# EAGLE board proto (EAGLE 9.3.2)
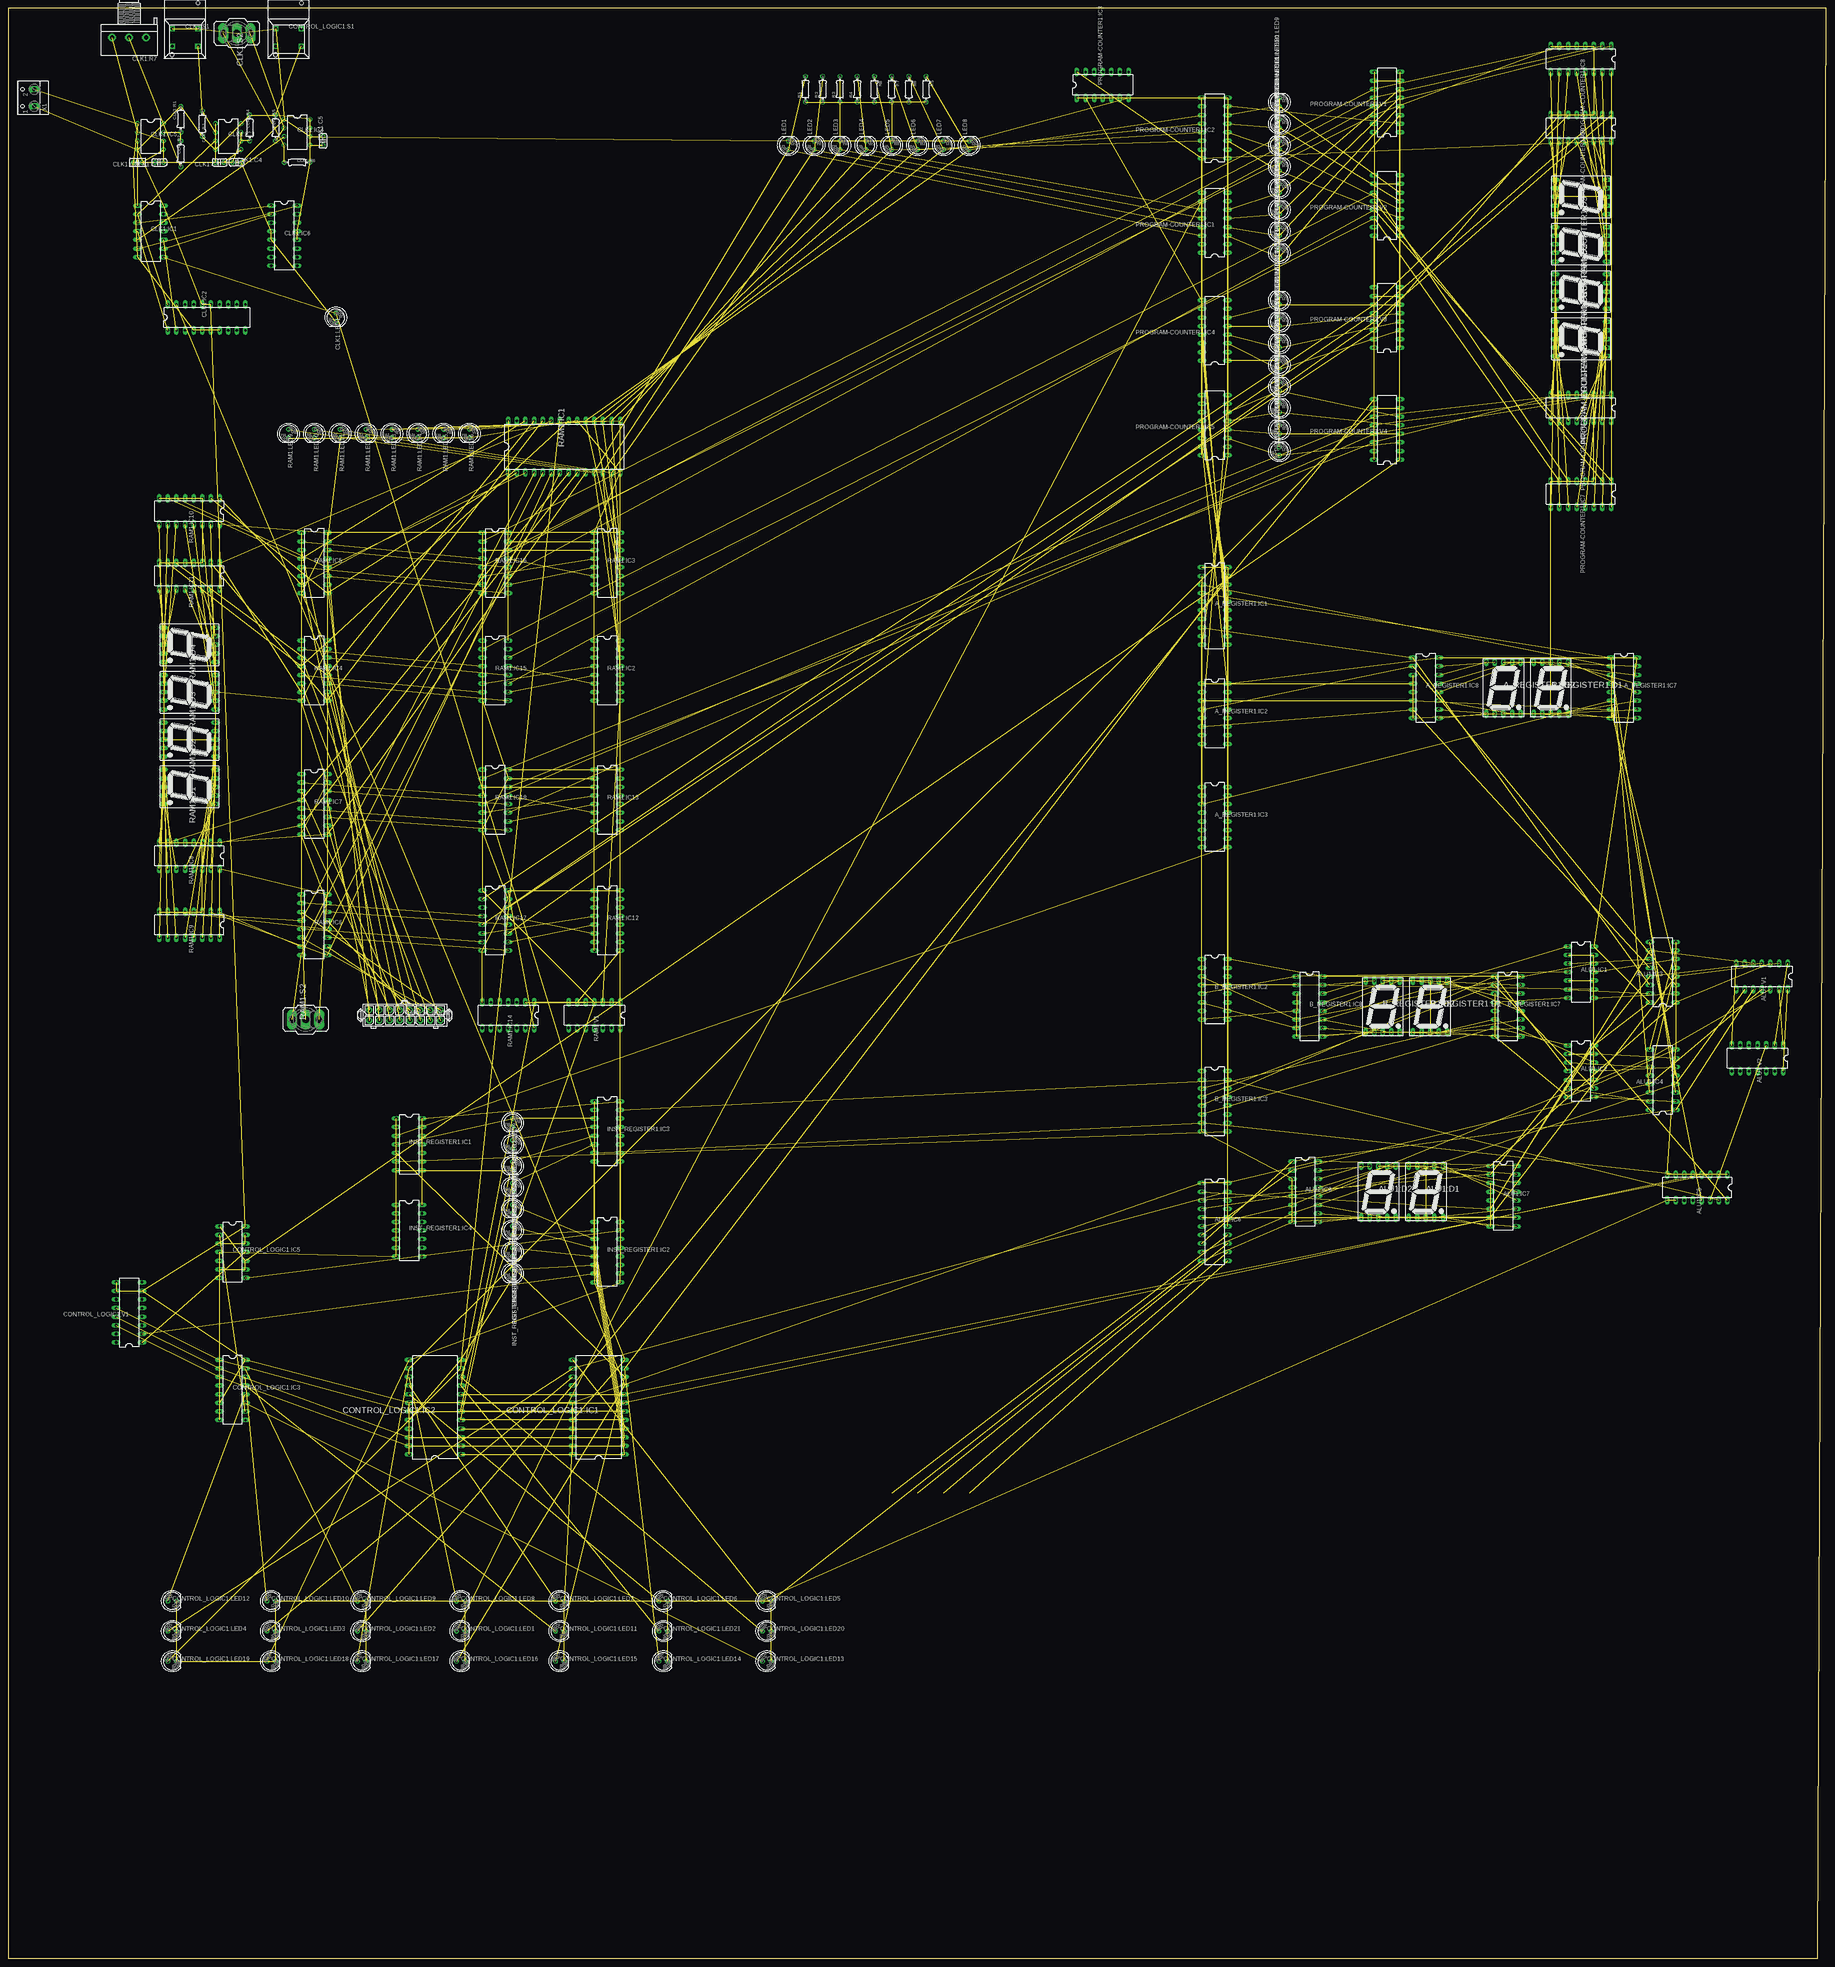
[diagram p0: board, top side]
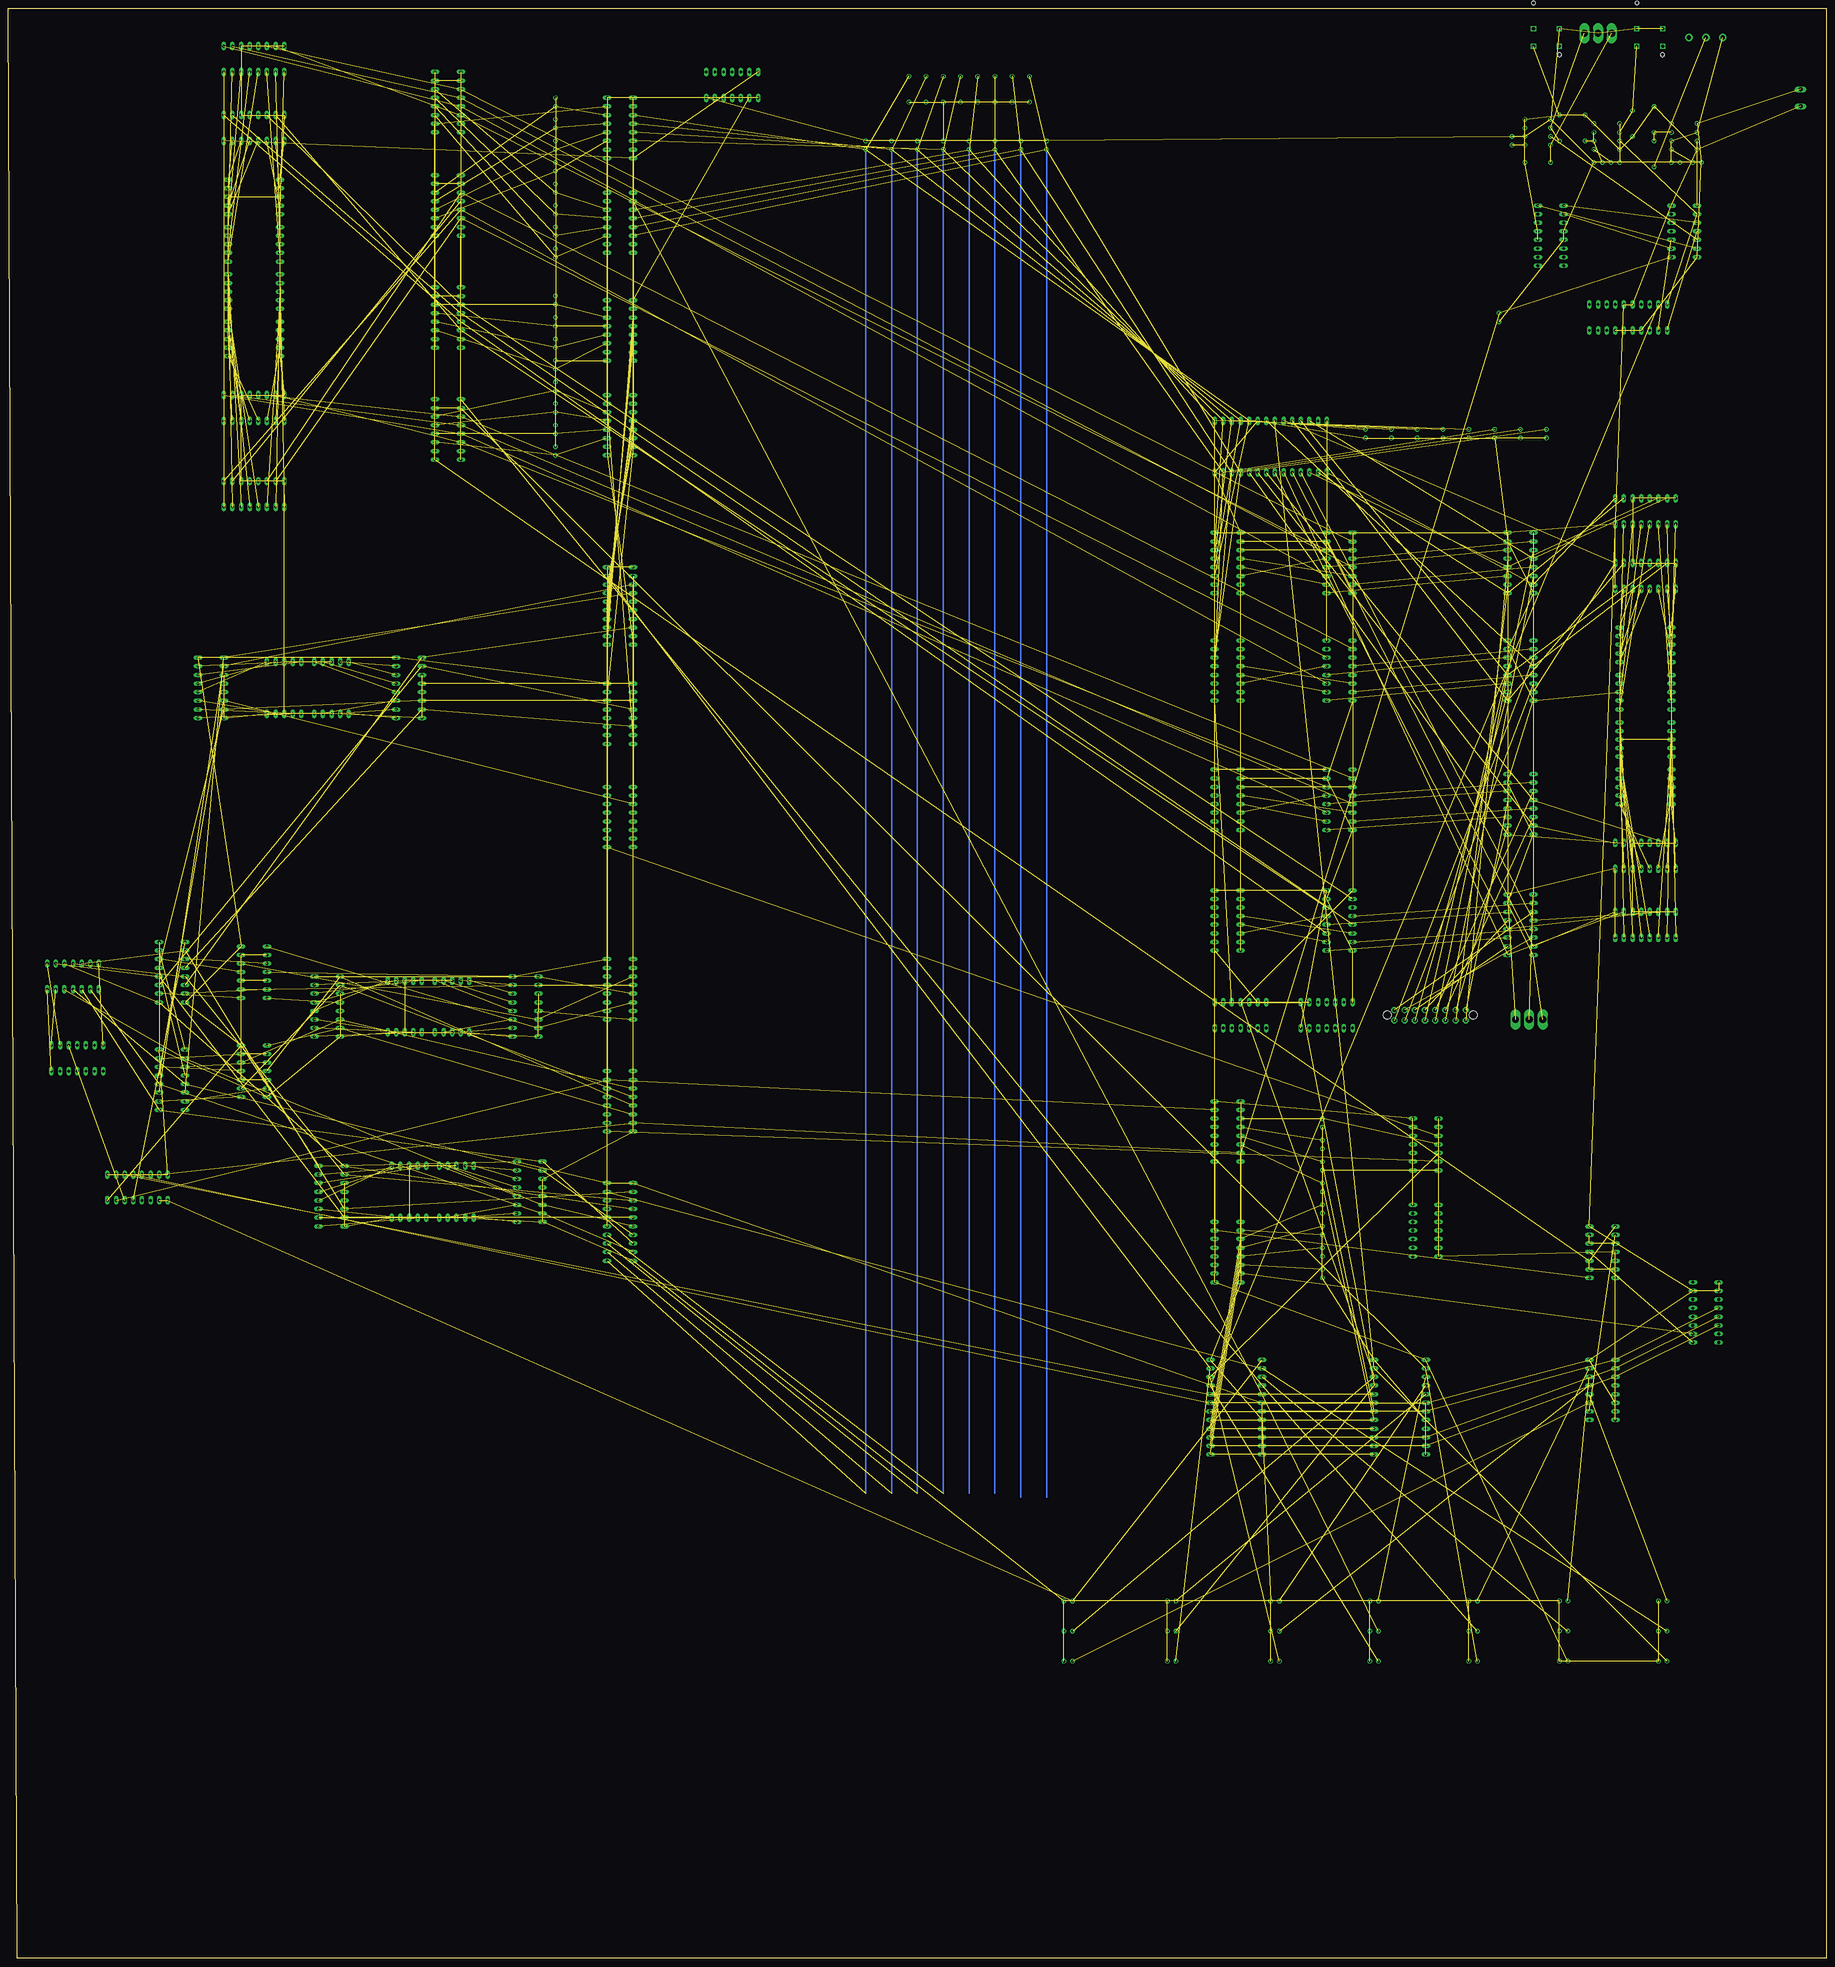
[diagram p1: board, bottom side, seen from below]

Size 535.92 x 574.98 mm. Coordinates in mm from the lower left corner, seen from the top.
Outline: 0,0 533.38,0 535.92,574.98 0,574.98 0,0
Copper layers (1*16): Top 0.035mm / dielectric 1.5mm / Bottom 0.035mm
Design rules "default": minimum track width 6mil, minimum drill 0.35mm, track to track 6mil, track to pad 6mil, pad to pad 6mil, via to via 6mil, smd to smd 6mil, copper to edge 40mil, drill to drill 6mil, minimum pad ring 10mil, minimum via ring 8mil, stop-mask expansion 4mil, vias tented up to drill 0mil, thermal gap 10mil

## Footprints (pad centres in the part's own frame; a part is rotated, then mirrored left to right if it is on the bottom)
7SEG-13 = drill 0.813 long: 1 -5.08,-7.62; 2 -2.54,-7.62; 3 0,-7.62; 4 2.54,-7.62; 5 5.08,-7.62; 6 5.08,7.62; 7 2.54,7.62; 8 0,7.62; 9 -2.54,7.62; 10 -5.08,7.62
DIL20 = drill 0.813 long: 1 -11.43,-3.81; 2 -8.89,-3.81; 3 -6.35,-3.81; 4 -3.81,-3.81; 5 -1.27,-3.81; 6 1.27,-3.81; 7 3.81,-3.81; 8 6.35,-3.81; 9 8.89,-3.81; 10 11.43,-3.81; 11 11.43,3.81; 12 8.89,3.81; 13 6.35,3.81; 14 3.81,3.81; 15 1.27,3.81; 16 -1.27,3.81; 17 -3.81,3.81; 18 -6.35,3.81; 19 -8.89,3.81; 20 -11.43,3.81
DIL16 = drill 0.813 long: 1 -8.89,-3.81; 2 -6.35,-3.81; 3 -3.81,-3.81; 4 -1.27,-3.81; 5 1.27,-3.81; 6 3.81,-3.81; 7 6.35,-3.81; 8 8.89,-3.81; 9 8.89,3.81; 10 6.35,3.81; 11 3.81,3.81; 12 1.27,3.81; 13 -1.27,3.81; 14 -3.81,3.81; 15 -6.35,3.81; 16 -8.89,3.81
DIL14 = drill 0.813 long: 1 -7.62,-3.81; 2 -5.08,-3.81; 3 -2.54,-3.81; 4 0,-3.81; 5 2.54,-3.81; 6 5.08,-3.81; 7 7.62,-3.81; 8 7.62,3.81; 9 5.08,3.81; 10 2.54,3.81; 11 0,3.81; 12 -2.54,3.81; 13 -5.08,3.81; 14 -7.62,3.81
C025-024X044 = drill 0.813 octagon: 1 -1.27,0; 2 1.27,0
C025-025X050 = drill 0.813 octagon: 1 -1.27,0; 2 1.27,0
DIL08 = drill 0.813 pad 1.27: 1 -3.81,-3.81; 2 -1.27,-3.81; 3 1.27,-3.81; 4 3.81,-3.81; 5 3.81,3.81; 6 1.27,3.81; 7 -1.27,3.81; 8 -3.81,3.81
LED5MM = drill 0.813 octagon: A -1.27,0; K 1.27,0
0204/7 = drill 0.813 octagon: 1 -3.81,0; 2 3.81,0
3RP/1610N = drill 1.2 pad 2.184: 1 -5,0; 2 0,0; 3 5,0
5501 = drill 0.9 pad 1.5 square: 1A 0,3.81; 1B 0,-3.81; NC 5.08,-3.81; NO 5.08,3.81 | hole 1.1: -7.62,3.81; 7.62,-3.81
320-916 = drill 2.007 long: 1 0,4.013; 2 0,0; 3 0,-4.013
DIL24 = drill 0.813 long: 1 -13.97,-7.62; 2 -11.43,-7.62; 3 -8.89,-7.62; 4 -6.35,-7.62; 5 -3.81,-7.62; 6 -1.27,-7.62; 7 1.27,-7.62; 8 3.81,-7.62; 9 6.35,-7.62; 10 8.89,-7.62; 11 11.43,-7.62; 12 13.97,-7.62; 13 13.97,7.62; 14 11.43,7.62; 15 8.89,7.62; 16 6.35,7.62; 17 3.81,7.62; 18 1.27,7.62; 19 -1.27,7.62; 20 -3.81,7.62; 21 -6.35,7.62; 22 -8.89,7.62; 23 -11.43,7.62; 24 -13.97,7.62
DIL28-6 = drill 0.813 long: 1 -16.51,-7.62; 2 -13.97,-7.62; 3 -11.43,-7.62; 4 -8.89,-7.62; 5 -6.35,-7.62; 6 -3.81,-7.62; 7 -1.27,-7.62; 8 1.27,-7.62; 9 3.81,-7.62; 10 6.35,-7.62; 11 8.89,-7.62; 12 11.43,-7.62; 13 13.97,-7.62; 14 16.51,-7.62; 15 16.51,7.62; 16 13.97,7.62; 17 11.43,7.62; 18 8.89,7.62; 19 6.35,7.62; 20 3.81,7.62; 21 1.27,7.62; 22 -1.27,7.62; 23 -3.81,7.62; 24 -6.35,7.62; 25 -8.89,7.62; 26 -11.43,7.62; 27 -13.97,7.62; 28 -16.51,7.62
1-794681-6 = drill 1 pad 1.778: 1 10.5,-1.5; 2 10.5,1.5; 3 7.5,-1.5; 4 7.5,1.5; 5 4.5,-1.5; 6 4.5,1.5; 7 1.5,-1.5; 8 1.5,1.5; 9 -1.5,-1.5; 10 -1.5,1.5; 11 -4.5,-1.5; 12 -4.5,1.5; 13 -7.5,-1.5; 14 -7.5,1.5; 15 -10.5,-1.5; 16 -10.5,1.5 | hole 2.4: 12.63,0; -12.67,0
W237-102 = drill 1.194 long: 1 -2.5,-1.27; 2 2.5,-1.27

## Placement (x,y rotation side)
A_REGISTER1:D1  [7SEG-13]  454.66,374.65 0 top
A_REGISTER1:D2  [7SEG-13]  440.69,374.65 0 top
A_REGISTER1:IC1  74ACT245N  [DIL20]  355.6,398.78 270 top
A_REGISTER1:IC2  74HC173N  [DIL16]  355.6,367.03 270 top
A_REGISTER1:IC3  74HC173N  [DIL16]  355.6,336.55 270 top
A_REGISTER1:IC7  74LS47N  [DIL16]  476.25,374.65 270 top
A_REGISTER1:IC8  74LS47N  [DIL16]  417.83,374.65 270 top
ALU1:D1  [7SEG-13]  417.83,226.06 0 top
ALU1:D2  [7SEG-13]  403.86,226.06 0 top
ALU1:IC1  74LS86N  [DIL14]  463.55,290.83 270 top
ALU1:IC2  74LS86N  [DIL14]  463.55,261.62 270 top
ALU1:IC3  74AC283N  [DIL16]  487.68,290.83 90 top
ALU1:IC4  74AC283N  [DIL16]  487.68,259.08 90 top
ALU1:IC5  74HC173N  [DIL16]  497.84,227.33 180 top
ALU1:IC6  74ACT245N  [DIL20]  355.6,217.17 270 top
ALU1:IC7  74LS47N  [DIL16]  440.69,224.79 270 top
ALU1:IC8  74LS47N  [DIL16]  382.27,226.06 270 top
ALU1:V1  744002N  [DIL14]  516.89,289.56 180 top
ALU1:V2  7409N  [DIL14]  515.62,265.43 180 top
B_REGISTER1:D1  [7SEG-13]  419.1,280.67 0 top
B_REGISTER1:D2  [7SEG-13]  405.13,280.67 0 top
B_REGISTER1:IC2  74HC173N  [DIL16]  355.6,285.75 270 top
B_REGISTER1:IC3  74HC173N  [DIL16]  355.6,252.73 270 top
B_REGISTER1:IC7  74LS47N  [DIL16]  441.96,280.67 270 top
B_REGISTER1:IC8  74LS47N  [DIL16]  383.54,280.67 270 top
CLK1:C1  1uf  [C025-024X044]  44.45,529.59 180 top
CLK1:C2  0.01uF  [C025-025X050]  38.1,529.59 180 top
CLK1:C3  0.01uF  [C025-024X044]  62.23,529.59 180 top
CLK1:C4  0.1uf  [C025-024X044]  67.31,529.59 0 top
CLK1:C5  0.01uF  [C025-024X044]  92.71,535.94 90 top
CLK1:IC1  74ALS09N  [DIL14]  41.91,509.27 270 top
CLK1:IC2  74AC11004  [DIL20]  58.42,483.87 0 top
CLK1:IC3  LM555N  [DIL08]  64.77,537.21 270 top
CLK1:IC4  LM555N  [DIL08]  85.09,538.48 270 top
CLK1:IC5  LM555N  [DIL08]  41.91,537.21 270 top
CLK1:IC6  74AC11032  [DIL16]  81.28,508 270 top
CLK1:LED1  [LED5MM]  96.52,483.87 270 top
CLK1:R1  1k  [0204/7]  50.8,542.29 90 top
CLK1:R2  1k  [0204/7]  50.8,532.13 90 top
CLK1:R3  1k  [0204/7]  57.15,541.02 270 top
CLK1:R4  1k  [0204/7]  71.12,539.75 90 top
CLK1:R5  1k  [0204/7]  78.74,539.75 90 top
CLK1:R6  1k  [0204/7]  85.09,529.59 0 top
CLK1:R7  [3RP/1610N]  35.56,566.42 180 top
CLK1:S1  5501  [5501]  52.07,568.96 270 top
CLK1:S2  [320-916]  67.31,567.69 270 top
CONTROL_LOGIC1:IC1  [DIL24]  173.99,162.56 90 top
CONTROL_LOGIC1:IC2  [DIL24]  125.73,162.56 90 top
CONTROL_LOGIC1:IC3  74AC138N  [DIL16]  66.04,167.64 270 top
CONTROL_LOGIC1:IC5  74AC00N  [DIL14]  66.04,208.28 270 top
CONTROL_LOGIC1:LED1  [LED5MM]  133.35,96.52 0 top
CONTROL_LOGIC1:LED2  [LED5MM]  104.14,96.52 0 top
CONTROL_LOGIC1:LED3  [LED5MM]  77.47,96.52 0 top
CONTROL_LOGIC1:LED4  [LED5MM]  48.26,96.52 0 top
CONTROL_LOGIC1:LED5  [LED5MM]  223.52,105.41 0 top
CONTROL_LOGIC1:LED6  [LED5MM]  193.04,105.41 0 top
CONTROL_LOGIC1:LED7  [LED5MM]  162.56,105.41 0 top
CONTROL_LOGIC1:LED8  [LED5MM]  133.35,105.41 0 top
CONTROL_LOGIC1:LED9  [LED5MM]  104.14,105.41 0 top
CONTROL_LOGIC1:LED10  [LED5MM]  77.47,105.41 0 top
CONTROL_LOGIC1:LED11  [LED5MM]  162.56,96.52 0 top
CONTROL_LOGIC1:LED12  [LED5MM]  48.26,105.41 0 top
CONTROL_LOGIC1:LED13  [LED5MM]  223.52,87.63 0 top
CONTROL_LOGIC1:LED14  [LED5MM]  193.04,87.63 0 top
CONTROL_LOGIC1:LED15  [LED5MM]  162.56,87.63 0 top
CONTROL_LOGIC1:LED16  [LED5MM]  133.35,87.63 0 top
CONTROL_LOGIC1:LED17  [LED5MM]  104.14,87.63 0 top
CONTROL_LOGIC1:LED18  [LED5MM]  77.47,87.63 0 top
CONTROL_LOGIC1:LED19  [LED5MM]  48.26,87.63 0 top
CONTROL_LOGIC1:LED20  [LED5MM]  223.52,96.52 0 top
CONTROL_LOGIC1:LED21  [LED5MM]  193.04,96.52 0 top
CONTROL_LOGIC1:S1  5501  [5501]  82.55,568.96 270 top
CONTROL_LOGIC1:V1  74161N  [DIL16]  35.56,190.5 90 top
INST_REGISTER1:IC1  74ALS09N  [DIL14]  118.11,240.03 270 top
INST_REGISTER1:IC2  74HC173N  [DIL16]  176.53,208.28 270 top
INST_REGISTER1:IC3  74HC173N  [DIL16]  176.53,243.84 270 top
INST_REGISTER1:IC4  74AC04N  [DIL14]  118.11,214.63 270 top
INST_REGISTER1:LED9  [LED5MM]  148.59,246.38 270 top
INST_REGISTER1:LED10  [LED5MM]  148.59,240.03 270 top
INST_REGISTER1:LED11  [LED5MM]  148.59,233.68 270 top
INST_REGISTER1:LED12  [LED5MM]  148.59,227.33 270 top
INST_REGISTER1:LED13  [LED5MM]  148.59,220.98 270 top
INST_REGISTER1:LED14  [LED5MM]  148.59,214.63 270 top
INST_REGISTER1:LED15  [LED5MM]  148.59,208.28 270 top
INST_REGISTER1:LED16  [LED5MM]  148.59,201.93 270 top
LED1  [LED5MM]  229.87,534.67 90 top
LED2  [LED5MM]  237.49,534.67 90 top
LED3  [LED5MM]  245.11,534.67 90 top
LED4  [LED5MM]  252.73,534.67 90 top
LED5  [LED5MM]  260.35,534.67 90 top
LED6  [LED5MM]  267.97,534.67 90 top
LED7  [LED5MM]  275.59,534.67 90 top
LED8  [LED5MM]  283.21,534.67 90 top
PROGRAM-COUNTER1:D1  [7SEG-13]  463.55,491.49 270 top
PROGRAM-COUNTER1:D2  [7SEG-13]  463.55,505.46 270 top
PROGRAM-COUNTER1:D3  [7SEG-13]  463.55,519.43 270 top
PROGRAM-COUNTER1:D4  [7SEG-13]  463.55,477.52 270 top
PROGRAM-COUNTER1:IC1  74HC173N  [DIL16]  355.6,511.81 90 top
PROGRAM-COUNTER1:IC2  74HC173N  [DIL16]  355.6,539.75 90 top
PROGRAM-COUNTER1:IC3  74AC04N  [DIL14]  322.58,552.45 0 top
PROGRAM-COUNTER1:IC4  74HC173N  [DIL16]  355.6,480.06 90 top
PROGRAM-COUNTER1:IC5  74HC173N  [DIL16]  355.6,452.12 90 top
PROGRAM-COUNTER1:IC7  74LS47N  [DIL16]  463.55,431.8 180 top
PROGRAM-COUNTER1:IC8  74LS47N  [DIL16]  463.55,560.07 180 top
PROGRAM-COUNTER1:IC9  74LS47N  [DIL16]  463.55,539.75 180 top
PROGRAM-COUNTER1:IC10  74LS47N  [DIL16]  463.55,457.2 180 top
PROGRAM-COUNTER1:LED1  [LED5MM]  374.65,488.95 90 top
PROGRAM-COUNTER1:LED2  [LED5MM]  374.65,482.6 90 top
PROGRAM-COUNTER1:LED3  [LED5MM]  374.65,476.25 90 top
PROGRAM-COUNTER1:LED4  [LED5MM]  374.65,469.9 90 top
PROGRAM-COUNTER1:LED5  [LED5MM]  374.65,463.55 90 top
PROGRAM-COUNTER1:LED6  [LED5MM]  374.65,457.2 90 top
PROGRAM-COUNTER1:LED7  [LED5MM]  374.65,450.85 90 top
PROGRAM-COUNTER1:LED8  [LED5MM]  374.65,444.5 90 top
PROGRAM-COUNTER1:LED9  [LED5MM]  374.65,547.37 90 top
PROGRAM-COUNTER1:LED10  [LED5MM]  374.65,541.02 90 top
PROGRAM-COUNTER1:LED11  [LED5MM]  374.65,534.67 90 top
PROGRAM-COUNTER1:LED12  [LED5MM]  374.65,528.32 90 top
PROGRAM-COUNTER1:LED13  [LED5MM]  374.65,521.97 90 top
PROGRAM-COUNTER1:LED14  [LED5MM]  374.65,515.62 90 top
PROGRAM-COUNTER1:LED15  [LED5MM]  374.65,509.27 90 top
PROGRAM-COUNTER1:LED16  [LED5MM]  374.65,502.92 90 top
PROGRAM-COUNTER1:V1  74161N  [DIL16]  406.4,547.37 90 top
PROGRAM-COUNTER1:V2  74161N  [DIL16]  406.4,516.89 90 top
PROGRAM-COUNTER1:V3  74161N  [DIL16]  406.4,483.87 90 top
PROGRAM-COUNTER1:V4  74161N  [DIL16]  406.4,450.85 90 top
R1  10k  [0204/7]  234.95,551.18 90 top
R2  10k  [0204/7]  240.03,551.18 90 top
R3  10k  [0204/7]  245.11,551.18 90 top
R4  10k  [0204/7]  250.19,551.18 90 top
R5  10k  [0204/7]  270.51,551.18 270 top
R6  10k  [0204/7]  265.43,551.18 270 top
R7  10k  [0204/7]  260.35,551.18 270 top
R8  10k  [0204/7]  255.27,551.18 270 top
RAM1:D1  [7SEG-13]  53.34,345.44 270 top
RAM1:D2  [7SEG-13]  53.34,359.41 270 top
RAM1:D3  [7SEG-13]  53.34,373.38 270 top
RAM1:D4  [7SEG-13]  53.34,387.35 270 top
RAM1:IC1  CY62256LL-PC  [DIL28-6]  163.83,445.77 0 top
RAM1:IC2  74HC173N  [DIL16]  176.53,379.73 270 top
RAM1:IC3  74HC173N  [DIL16]  176.53,411.48 270 top
RAM1:IC4  74AC157N  [DIL16]  90.17,379.73 270 top
RAM1:IC5  74AC157N  [DIL16]  90.17,411.48 270 top
RAM1:IC6  74AC157N  [DIL16]  90.17,304.8 270 top
RAM1:IC7  74AC157N  [DIL16]  90.17,340.36 270 top
RAM1:IC8  74LS47N  [DIL16]  53.34,325.12 180 top
RAM1:IC9  74LS47N  [DIL16]  53.34,304.8 180 top
RAM1:IC10  74LS47N  [DIL16]  53.34,426.72 180 top
RAM1:IC11  74LS47N  [DIL16]  53.34,407.67 180 top
RAM1:IC12  74HC173N  [DIL16]  176.53,306.07 270 top
RAM1:IC13  74HC173N  [DIL16]  176.53,341.63 270 top
RAM1:IC14  74AC04N  [DIL14]  147.32,278.13 180 top
RAM1:IC15  74AC157N  [DIL16]  143.51,379.73 270 top
RAM1:IC16  74AC157N  [DIL16]  143.51,411.48 270 top
RAM1:IC17  74AC157N  [DIL16]  143.51,306.07 270 top
RAM1:IC18  74AC157N  [DIL16]  143.51,341.63 270 top
RAM1:LED9  [LED5MM]  82.55,449.58 270 top
RAM1:LED10  [LED5MM]  90.17,449.58 270 top
RAM1:LED11  [LED5MM]  97.79,449.58 270 top
RAM1:LED12  [LED5MM]  105.41,449.58 270 top
RAM1:LED13  [LED5MM]  113.03,449.58 270 top
RAM1:LED14  [LED5MM]  120.65,449.58 270 top
RAM1:LED15  [LED5MM]  128.27,449.58 270 top
RAM1:LED16  [LED5MM]  135.89,449.58 270 top
RAM1:M_ADDR  1-794681-6  [1-794681-6]  116.84,278.13 0 top
RAM1:S2  [320-916]  87.63,276.86 90 top
RAM1:V1  7409N  [DIL14]  172.72,278.13 180 top
X1  [W237-102]  6.35,548.64 90 top

## Library data of the parts
A_REGISTER1:D1 A_REGISTER1:D2 ALU1:D1 ALU1:D2 B_REGISTER1:D1 B_REGISTER1:D2 PROGRAM-COUNTER1:D1-PROGRAM-COUNTER1:D4 RAM1:D1-RAM1:D4 = special
A_REGISTER1:IC1-A_REGISTER1:IC3 A_REGISTER1:IC7 A_REGISTER1:IC8 ALU1:IC3-ALU1:IC8 B_REGISTER1:IC2 B_REGISTER1:IC3 B_REGISTER1:IC7 B_REGISTER1:IC8 CLK1:IC1 CONTROL_LOGIC1:IC3 CONTROL_LOGIC1:IC5 INST_REGISTER1:IC1-INST_REGISTER1:IC4 PROGRAM-COUNTER1:IC1-PROGRAM-COUNTER1:IC5 PROGRAM-COUNTER1:IC7-PROGRAM-COUNTER1:IC10 RAM1:IC2-RAM1:IC18 = 74xx-eu
ALU1:IC1 ALU1:IC2 = 74xx-us
ALU1:V1 ALU1:V2 CONTROL_LOGIC1:V1 PROGRAM-COUNTER1:V1-PROGRAM-COUNTER1:V4 RAM1:V1 = 74ttl-din
CLK1:C1-CLK1:C5 = rcl
CLK1:IC2 CLK1:IC6 = 74ac-logic
CLK1:IC3-CLK1:IC5 = linear
CLK1:LED1 CONTROL_LOGIC1:LED1-CONTROL_LOGIC1:LED21 INST_REGISTER1:LED9-INST_REGISTER1:LED16 LED1-LED8 PROGRAM-COUNTER1:LED1-PROGRAM-COUNTER1:LED16 RAM1:LED9-RAM1:LED16 = led
CLK1:R1-CLK1:R6 R1-R8 = rcl; SPICEPREFIX: R
CLK1:R7 = pot
CLK1:S1 CLK1:S2 CONTROL_LOGIC1:S1 RAM1:S2 = switch
CONTROL_LOGIC1:IC1 CONTROL_LOGIC1:IC2 = memory
RAM1:IC1 = memory-sram
RAM1:M_ADDR = con-amp
X1 = con-wago-500; MPN: 237-102; OC_FARNELL: unknown; OC_NEWARK: 70K9898

## Nets
8B_1: A_REGISTER1:IC1.18 A_REGISTER1:IC3.14 ALU1:IC6.18 B_REGISTER1:IC3.14 INST_REGISTER1:IC3.14 LED1.A PROGRAM-COUNTER1:IC1.14 PROGRAM-COUNTER1:IC5.14 R1.2 RAM1:IC1.11 RAM1:IC2.14 RAM1:IC12.14 RAM1:LED9.A
8B_2: A_REGISTER1:IC1.17 A_REGISTER1:IC3.13 ALU1:IC6.17 B_REGISTER1:IC3.13 INST_REGISTER1:IC3.13 LED2.A PROGRAM-COUNTER1:IC1.13 PROGRAM-COUNTER1:IC5.13 R2.2 RAM1:IC1.12 RAM1:IC2.13 RAM1:IC12.13 RAM1:LED10.A
8B_3: A_REGISTER1:IC1.16 A_REGISTER1:IC3.12 ALU1:IC6.16 B_REGISTER1:IC3.12 INST_REGISTER1:IC3.12 LED3.A PROGRAM-COUNTER1:IC1.12 PROGRAM-COUNTER1:IC5.12 R3.2 RAM1:IC1.13 RAM1:IC2.12 RAM1:IC12.12 RAM1:LED11.A
8B_4: A_REGISTER1:IC1.15 A_REGISTER1:IC3.11 ALU1:IC6.15 B_REGISTER1:IC3.11 INST_REGISTER1:IC3.11 LED4.A PROGRAM-COUNTER1:IC1.11 PROGRAM-COUNTER1:IC5.11 R4.2 RAM1:IC1.15 RAM1:IC2.11 RAM1:IC12.11 RAM1:LED12.A
8B_5: A_REGISTER1:IC1.14 A_REGISTER1:IC2.14 ALU1:IC6.14 LED5.A PROGRAM-COUNTER1:IC2.14 PROGRAM-COUNTER1:IC4.14 R8.1 RAM1:IC1.16 RAM1:IC3.14 RAM1:IC13.14 RAM1:LED13.A
8B_6: A_REGISTER1:IC1.13 A_REGISTER1:IC2.13 ALU1:IC6.13 LED6.A PROGRAM-COUNTER1:IC2.13 PROGRAM-COUNTER1:IC4.13 R7.1 RAM1:IC1.17 RAM1:IC3.13 RAM1:IC13.13 RAM1:LED14.A
8B_7: A_REGISTER1:IC1.12 A_REGISTER1:IC2.12 ALU1:IC6.12 LED7.A PROGRAM-COUNTER1:IC2.12 PROGRAM-COUNTER1:IC4.12 R6.1 RAM1:IC1.18 RAM1:IC3.12 RAM1:IC13.12 RAM1:LED15.A
8B_8: A_REGISTER1:IC1.11 A_REGISTER1:IC2.11 ALU1:IC6.11 LED8.A PROGRAM-COUNTER1:IC2.11 PROGRAM-COUNTER1:IC4.11 R5.1 RAM1:IC1.19 RAM1:IC3.11 RAM1:IC13.11 RAM1:LED16.A
A_REGISTER1:N$9: A_REGISTER1:D1.7 A_REGISTER1:IC7.13
A_REGISTER1:N$10: A_REGISTER1:D1.6 A_REGISTER1:IC7.12
A_REGISTER1:N$11: A_REGISTER1:D1.4 A_REGISTER1:IC7.11
A_REGISTER1:N$12: A_REGISTER1:D1.2 A_REGISTER1:IC7.10
A_REGISTER1:N$13: A_REGISTER1:D1.1 A_REGISTER1:IC7.9
A_REGISTER1:N$14: A_REGISTER1:D1.9 A_REGISTER1:IC7.15
A_REGISTER1:N$15: A_REGISTER1:D1.10 A_REGISTER1:IC7.14
A_REGISTER1:N$16: A_REGISTER1:D2.7 A_REGISTER1:IC8.13
A_REGISTER1:N$21: A_REGISTER1:D2.6 A_REGISTER1:IC8.12
A_REGISTER1:N$22: A_REGISTER1:D2.4 A_REGISTER1:IC8.11
A_REGISTER1:N$23: A_REGISTER1:D2.2 A_REGISTER1:IC8.10
A_REGISTER1:N$24: A_REGISTER1:D2.1 A_REGISTER1:IC8.9
A_REGISTER1:N$29: A_REGISTER1:D2.9 A_REGISTER1:IC8.15
A_REGISTER1:N$30: A_REGISTER1:D2.10 A_REGISTER1:IC8.14
ALU1:+UB: ALU1:V1.14 ALU1:V2.14
ALU1:-UB: ALU1:V1.7 ALU1:V2.7
ALU1:A_9: ALU1:IC4.4 ALU1:IC6.9 ALU1:IC8.7 ALU1:V1.9
ALU1:A_10: ALU1:IC4.1 ALU1:IC6.8 ALU1:IC8.1 ALU1:V1.10
ALU1:A_11: ALU1:IC4.10 ALU1:IC6.6 ALU1:IC8.6 ALU1:V1.12
ALU1:A_12: ALU1:IC4.13 ALU1:IC6.7 ALU1:IC8.2 ALU1:V1.11
ALU1:A_13: ALU1:IC3.4 ALU1:IC6.5 ALU1:IC7.7 ALU1:V1.2
ALU1:A_14: ALU1:IC3.1 ALU1:IC6.4 ALU1:IC7.1 ALU1:V1.3
ALU1:A_15: ALU1:IC3.13 ALU1:IC6.3 ALU1:IC7.2 ALU1:V1.4
ALU1:A_16: ALU1:IC3.10 ALU1:IC6.2 ALU1:IC7.6 ALU1:V1.5
ALU1:N$1: ALU1:IC2.11 ALU1:IC4.6
ALU1:N$2: ALU1:IC2.8 ALU1:IC4.2
ALU1:N$3: ALU1:IC2.6 ALU1:IC4.15
ALU1:N$4: ALU1:IC2.3 ALU1:IC4.11
ALU1:N$5: ALU1:IC1.11 ALU1:IC3.6
ALU1:N$6: ALU1:IC1.6 ALU1:IC3.15
ALU1:N$7: ALU1:IC1.8 ALU1:IC3.2
ALU1:N$8: ALU1:IC1.3 ALU1:IC3.11
ALU1:N$9: ALU1:IC3.7 ALU1:IC4.9
ALU1:N$10: ALU1:D1.7 ALU1:IC7.13
ALU1:N$11: ALU1:D1.6 ALU1:IC7.12
ALU1:N$12: ALU1:D1.4 ALU1:IC7.11
ALU1:N$13: ALU1:D1.2 ALU1:IC7.10
ALU1:N$14: ALU1:D1.1 ALU1:IC7.9
ALU1:N$15: ALU1:D1.9 ALU1:IC7.15
ALU1:N$16: ALU1:D1.10 ALU1:IC7.14
ALU1:N$17: ALU1:D2.7 ALU1:IC8.13
ALU1:N$18: ALU1:V1.1 ALU1:V2.2
ALU1:N$19: ALU1:V1.13 ALU1:V2.1
ALU1:N$20: ALU1:IC5.14 ALU1:V2.3
ALU1:N$21: ALU1:D2.6 ALU1:IC8.12
ALU1:N$22: ALU1:D2.4 ALU1:IC8.11
ALU1:N$23: ALU1:D2.2 ALU1:IC8.10
ALU1:N$24: ALU1:D2.1 ALU1:IC8.9
ALU1:N$25: ALU1:IC3.9 ALU1:IC5.13
ALU1:N$29: ALU1:D2.9 ALU1:IC8.15
ALU1:N$30: ALU1:D2.10 ALU1:IC8.14
ALUSUB: CONTROL_LOGIC1:IC1.15 CONTROL_LOGIC1:LED3.A
B_REGISTER1:8B_9: B_REGISTER1:IC2.11
B_REGISTER1:8B_10: B_REGISTER1:IC2.12
B_REGISTER1:8B_11: B_REGISTER1:IC2.13
B_REGISTER1:8B_12: B_REGISTER1:IC2.14
B_REGISTER1:N$9: B_REGISTER1:D1.7 B_REGISTER1:IC7.13
B_REGISTER1:N$10: B_REGISTER1:D1.6 B_REGISTER1:IC7.12
B_REGISTER1:N$11: B_REGISTER1:D1.4 B_REGISTER1:IC7.11
B_REGISTER1:N$12: B_REGISTER1:D1.2 B_REGISTER1:IC7.10
B_REGISTER1:N$13: B_REGISTER1:D1.1 B_REGISTER1:IC7.9
B_REGISTER1:N$14: B_REGISTER1:D1.9 B_REGISTER1:IC7.15
B_REGISTER1:N$15: B_REGISTER1:D1.10 B_REGISTER1:IC7.14
B_REGISTER1:N$16: B_REGISTER1:D2.7 B_REGISTER1:IC8.13
B_REGISTER1:N$21: B_REGISTER1:D2.6 B_REGISTER1:IC8.12
B_REGISTER1:N$22: B_REGISTER1:D2.4 B_REGISTER1:IC8.11
B_REGISTER1:N$23: B_REGISTER1:D2.2 B_REGISTER1:IC8.10
B_REGISTER1:N$24: B_REGISTER1:D2.1 B_REGISTER1:IC8.9
B_REGISTER1:N$29: B_REGISTER1:D2.9 B_REGISTER1:IC8.15
B_REGISTER1:N$30: B_REGISTER1:D2.10 B_REGISTER1:IC8.14
B_REGISTER1:VCC: B_REGISTER1:IC2.16 B_REGISTER1:IC3.16 B_REGISTER1:IC7.16 B_REGISTER1:IC8.16
CF: ALU1:IC5.4 CONTROL_LOGIC1:IC1.7 CONTROL_LOGIC1:IC2.7
CLK: A_REGISTER1:IC2.7 A_REGISTER1:IC3.7 ALU1:IC5.7 B_REGISTER1:IC2.7 B_REGISTER1:IC3.7 CLK1:IC1.8 CLK1:LED1.A CONTROL_LOGIC1:V1.2 INST_REGISTER1:IC2.7 INST_REGISTER1:IC3.7 PROGRAM-COUNTER1:IC1.7 PROGRAM-COUNTER1:IC2.7 PROGRAM-COUNTER1:IC4.7 PROGRAM-COUNTER1:IC5.7 PROGRAM-COUNTER1:V1.2 PROGRAM-COUNTER1:V2.2 PROGRAM-COUNTER1:V3.2 PROGRAM-COUNTER1:V4.2
CLK1:ACLK: CLK1:IC1.1 CLK1:IC5.3
CLK1:AMS: CLK1:IC1.5 CLK1:IC4.3
CLK1:MCLK: CLK1:IC1.2 CLK1:IC2.20 CLK1:IC3.3
CLK1:N$1: CLK1:IC4.2 CLK1:R5.1 CLK1:S2.1
CLK1:N$2: CLK1:IC3.2 CLK1:R3.1 CLK1:S1.NO
CLK1:N$3: CLK1:IC4.4 CLK1:R6.1 CLK1:S2.3
CLK1:N$4: CLK1:C3.1 CLK1:IC3.5
CLK1:N$5: CLK1:C5.1 CLK1:IC4.5
CLK1:N$7: CLK1:C4.1 CLK1:IC3.6 CLK1:IC3.7 CLK1:R4.1
CLK1:N$8: CLK1:IC1.10 CLK1:IC2.2
CLK1:N$9: CLK1:IC5.7 CLK1:R1.1 CLK1:R2.2
CLK1:N$10: CLK1:C2.1 CLK1:IC5.5
CLK1:N$11: CLK1:R2.1 CLK1:R7.2
CLK1:N$12: CLK1:IC1.6 CLK1:IC6.16
CLK1:N$13: CLK1:IC1.3 CLK1:IC6.1
CLK1:N$14: CLK1:IC1.9 CLK1:IC6.2
CLK1:N$17: CLK1:IC1.4 CLK1:IC2.1
CLK1:NC: CLK1:IC4.7
CLK1:TRIGGER: CLK1:C1.1 CLK1:IC5.2 CLK1:IC5.6 CLK1:R7.3
CLR: A_REGISTER1:IC2.15 A_REGISTER1:IC3.15 ALU1:IC5.15 B_REGISTER1:IC2.15 B_REGISTER1:IC3.15 CONTROL_LOGIC1:IC5.8 INST_REGISTER1:IC2.15 INST_REGISTER1:IC3.15 PROGRAM-COUNTER1:IC1.15 PROGRAM-COUNTER1:IC2.15 PROGRAM-COUNTER1:IC4.15 PROGRAM-COUNTER1:IC5.15
CONTROL_LOGIC1:+UB: CONTROL_LOGIC1:V1.16
CONTROL_LOGIC1:-UB: CONTROL_LOGIC1:V1.8
CONTROL_LOGIC1:N$1: CONTROL_LOGIC1:IC1.19 CONTROL_LOGIC1:IC2.19 CONTROL_LOGIC1:IC3.1 CONTROL_LOGIC1:V1.12
CONTROL_LOGIC1:N$2: CONTROL_LOGIC1:IC1.22 CONTROL_LOGIC1:IC2.22 CONTROL_LOGIC1:IC3.2 CONTROL_LOGIC1:V1.13
CONTROL_LOGIC1:N$3: CONTROL_LOGIC1:IC1.23 CONTROL_LOGIC1:IC2.23 CONTROL_LOGIC1:IC3.3 CONTROL_LOGIC1:V1.14
CONTROL_LOGIC1:N$4: CONTROL_LOGIC1:IC3.10 CONTROL_LOGIC1:IC5.2
CONTROL_LOGIC1:N$5: CONTROL_LOGIC1:IC3.15 CONTROL_LOGIC1:LED9.A
CONTROL_LOGIC1:N$6: CONTROL_LOGIC1:IC3.14 CONTROL_LOGIC1:LED10.A
CONTROL_LOGIC1:N$7: CONTROL_LOGIC1:IC5.3 CONTROL_LOGIC1:IC5.12 CONTROL_LOGIC1:IC5.13
CONTROL_LOGIC1:N$8: CONTROL_LOGIC1:IC5.11 CONTROL_LOGIC1:V1.1
CONTROL_LOGIC1:N$9: CONTROL_LOGIC1:IC3.13 CONTROL_LOGIC1:LED11.A
CONTROL_LOGIC1:N$10: CONTROL_LOGIC1:IC3.12 CONTROL_LOGIC1:LED12.A
CONTROL_LOGIC1:N$11: CONTROL_LOGIC1:IC3.11 CONTROL_LOGIC1:LED13.A
CONTROL_LOGIC1:N$27: CONTROL_LOGIC1:IC2.17 CONTROL_LOGIC1:LED6.A
CONTROL_LOGIC1:NNOW: CONTROL_LOGIC1:IC2.16 CONTROL_LOGIC1:LED7.A
CONTROL_LOGIC1:NNOW2: CONTROL_LOGIC1:IC2.15 CONTROL_LOGIC1:LED8.A
COUNT: CONTROL_LOGIC1:IC2.14 CONTROL_LOGIC1:LED17.A PROGRAM-COUNTER1:V1.7 PROGRAM-COUNTER1:V1.10 PROGRAM-COUNTER1:V2.7 PROGRAM-COUNTER1:V2.10 PROGRAM-COUNTER1:V3.7 PROGRAM-COUNTER1:V3.10 PROGRAM-COUNTER1:V4.7 PROGRAM-COUNTER1:V4.10
GND: A_REGISTER1:D1.3 A_REGISTER1:D1.5 A_REGISTER1:D1.8 A_REGISTER1:D2.3 A_REGISTER1:D2.5 A_REGISTER1:D2.8 A_REGISTER1:IC1.10 A_REGISTER1:IC2.1 A_REGISTER1:IC2.2 A_REGISTER1:IC2.8 A_REGISTER1:IC3.1 A_REGISTER1:IC3.2 A_REGISTER1:IC3.8 A_REGISTER1:IC7.3 A_REGISTER1:IC7.4 A_REGISTER1:IC7.5 A_REGISTER1:IC7.8 A_REGISTER1:IC8.3 A_REGISTER1:IC8.4 A_REGISTER1:IC8.5 A_REGISTER1:IC8.8 ALU1:D1.3 ALU1:D1.5 ALU1:D1.8 ALU1:D2.3 ALU1:D2.5 ALU1:D2.8 ALU1:IC1.7 ALU1:IC2.7 ALU1:IC3.8 ALU1:IC4.8 ALU1:IC5.1 ALU1:IC5.2 ALU1:IC5.8 ALU1:IC6.10 ALU1:IC7.3 ALU1:IC7.4 ALU1:IC7.5 ALU1:IC7.8 ALU1:IC8.3 ALU1:IC8.4 ALU1:IC8.5 ALU1:IC8.8 B_REGISTER1:D1.3 B_REGISTER1:D1.5 B_REGISTER1:D1.8 B_REGISTER1:D2.3 B_REGISTER1:D2.5 B_REGISTER1:D2.8 B_REGISTER1:IC2.1 B_REGISTER1:IC2.2 B_REGISTER1:IC2.8 B_REGISTER1:IC3.1 B_REGISTER1:IC3.2 B_REGISTER1:IC3.8 B_REGISTER1:IC7.3 B_REGISTER1:IC7.4 B_REGISTER1:IC7.5 B_REGISTER1:IC7.8 B_REGISTER1:IC8.3 B_REGISTER1:IC8.4 B_REGISTER1:IC8.5 B_REGISTER1:IC8.8 CLK1:C1.2 CLK1:C2.2 CLK1:C3.2 CLK1:C4.2 CLK1:C5.2 CLK1:IC1.7 CLK1:IC2.4 CLK1:IC2.5 CLK1:IC2.6 CLK1:IC2.7 CLK1:IC3.1 CLK1:IC4.1 CLK1:IC4.6 CLK1:IC5.1 CLK1:IC6.4 CLK1:IC6.5 CLK1:LED1.K CLK1:S1.1A CLK1:S1.1B CLK1:S2.2 CONTROL_LOGIC1:IC1.12 CONTROL_LOGIC1:IC1.20 CONTROL_LOGIC1:IC1.21 CONTROL_LOGIC1:IC2.12 CONTROL_LOGIC1:IC2.20 CONTROL_LOGIC1:IC2.21 CONTROL_LOGIC1:IC3.4 CONTROL_LOGIC1:IC3.5 CONTROL_LOGIC1:IC3.8 CONTROL_LOGIC1:IC5.4 CONTROL_LOGIC1:IC5.5 CONTROL_LOGIC1:IC5.7 CONTROL_LOGIC1:LED1.K CONTROL_LOGIC1:LED2.K CONTROL_LOGIC1:LED3.K CONTROL_LOGIC1:LED4.K CONTROL_LOGIC1:LED5.K CONTROL_LOGIC1:LED6.K CONTROL_LOGIC1:LED7.K CONTROL_LOGIC1:LED8.K CONTROL_LOGIC1:LED9.K CONTROL_LOGIC1:LED10.K CONTROL_LOGIC1:LED11.K CONTROL_LOGIC1:LED12.K CONTROL_LOGIC1:LED13.K CONTROL_LOGIC1:LED14.K CONTROL_LOGIC1:LED15.K CONTROL_LOGIC1:LED16.K CONTROL_LOGIC1:LED17.K CONTROL_LOGIC1:LED18.K CONTROL_LOGIC1:LED19.K CONTROL_LOGIC1:LED20.K CONTROL_LOGIC1:LED21.K CONTROL_LOGIC1:S1.1B INST_REGISTER1:IC1.7 INST_REGISTER1:IC2.1 INST_REGISTER1:IC2.2 INST_REGISTER1:IC2.8 INST_REGISTER1:IC3.1 INST_REGISTER1:IC3.2 INST_REGISTER1:IC3.8 INST_REGISTER1:IC4.7 INST_REGISTER1:LED9.K INST_REGISTER1:LED10.K INST_REGISTER1:LED11.K INST_REGISTER1:LED12.K INST_REGISTER1:LED13.K INST_REGISTER1:LED14.K INST_REGISTER1:LED15.K INST_REGISTER1:LED16.K LED1.K LED2.K LED3.K LED4.K LED5.K LED6.K LED7.K LED8.K PROGRAM-COUNTER1:D1.3 PROGRAM-COUNTER1:D1.5 PROGRAM-COUNTER1:D1.8 PROGRAM-COUNTER1:D2.3 PROGRAM-COUNTER1:D2.5 PROGRAM-COUNTER1:D2.8 PROGRAM-COUNTER1:D3.3 PROGRAM-COUNTER1:D3.5 PROGRAM-COUNTER1:D3.8 PROGRAM-COUNTER1:D4.3 PROGRAM-COUNTER1:D4.5 PROGRAM-COUNTER1:D4.8 PROGRAM-COUNTER1:IC1.1 PROGRAM-COUNTER1:IC1.2 PROGRAM-COUNTER1:IC1.8 PROGRAM-COUNTER1:IC2.1 PROGRAM-COUNTER1:IC2.2 PROGRAM-COUNTER1:IC2.8 PROGRAM-COUNTER1:IC3.7 PROGRAM-COUNTER1:IC4.1 PROGRAM-COUNTER1:IC4.2 PROGRAM-COUNTER1:IC4.8 PROGRAM-COUNTER1:IC5.1 PROGRAM-COUNTER1:IC5.2 PROGRAM-COUNTER1:IC5.8 PROGRAM-COUNTER1:IC7.3 PROGRAM-COUNTER1:IC7.4 PROGRAM-COUNTER1:IC7.5 PROGRAM-COUNTER1:IC7.8 PROGRAM-COUNTER1:IC8.3 PROGRAM-COUNTER1:IC8.4 PROGRAM-COUNTER1:IC8.5 PROGRAM-COUNTER1:IC8.8 PROGRAM-COUNTER1:IC9.3 PROGRAM-COUNTER1:IC9.4 PROGRAM-COUNTER1:IC9.5 PROGRAM-COUNTER1:IC9.8 PROGRAM-COUNTER1:IC10.3 PROGRAM-COUNTER1:IC10.4 PROGRAM-COUNTER1:IC10.5 PROGRAM-COUNTER1:IC10.8 PROGRAM-COUNTER1:LED1.K PROGRAM-COUNTER1:LED2.K PROGRAM-COUNTER1:LED3.K PROGRAM-COUNTER1:LED4.K PROGRAM-COUNTER1:LED5.K PROGRAM-COUNTER1:LED6.K PROGRAM-COUNTER1:LED7.K PROGRAM-COUNTER1:LED8.K PROGRAM-COUNTER1:LED9.K PROGRAM-COUNTER1:LED10.K PROGRAM-COUNTER1:LED11.K PROGRAM-COUNTER1:LED12.K PROGRAM-COUNTER1:LED13.K PROGRAM-COUNTER1:LED14.K PROGRAM-COUNTER1:LED15.K PROGRAM-COUNTER1:LED16.K R1.1 R2.1 R3.1 R4.1 R5.2 R6.2 R7.2 R8.2 X1.2
HLT: CLK1:IC2.19 CONTROL_LOGIC1:IC1.9 CONTROL_LOGIC1:LED16.A
INST_REGISTER1:8B_9: INST_REGISTER1:IC2.11
INST_REGISTER1:8B_10: INST_REGISTER1:IC2.12
INST_REGISTER1:8B_11: INST_REGISTER1:IC2.13
INST_REGISTER1:8B_12: INST_REGISTER1:IC2.14
INST_REGISTER1:INST_2: INST_REGISTER1:IC3.4 INST_REGISTER1:LED10.A
INST_REGISTER1:N$4: INST_REGISTER1:IC1.1 INST_REGISTER1:IC4.2
INST_REGISTER1:SLC_REG: INST_REGISTER1:IC1.4 INST_REGISTER1:IC3.3 INST_REGISTER1:IC4.1 INST_REGISTER1:LED9.A
INST_REGISTER1:VCC: INST_REGISTER1:IC1.14 INST_REGISTER1:IC2.16 INST_REGISTER1:IC3.16 INST_REGISTER1:IC4.14
N$1: PROGRAM-COUNTER1:IC7.6 PROGRAM-COUNTER1:V2.11 RAM1:IC15.2
N$2: PROGRAM-COUNTER1:IC7.2 PROGRAM-COUNTER1:V2.12
N$3: PROGRAM-COUNTER1:IC7.1 PROGRAM-COUNTER1:V2.13 RAM1:IC15.11
N$4: PROGRAM-COUNTER1:IC7.7 PROGRAM-COUNTER1:V2.14 RAM1:IC15.14
N$5: PROGRAM-COUNTER1:IC8.6 PROGRAM-COUNTER1:V1.11 RAM1:IC16.2
N$6: PROGRAM-COUNTER1:IC8.2 PROGRAM-COUNTER1:V1.12 RAM1:IC16.5
N$7: PROGRAM-COUNTER1:IC8.1 PROGRAM-COUNTER1:V1.13 RAM1:IC16.11
N$8: PROGRAM-COUNTER1:IC8.7 PROGRAM-COUNTER1:V1.14 RAM1:IC16.14
N$9: PROGRAM-COUNTER1:IC9.6 PROGRAM-COUNTER1:V3.11 RAM1:IC17.2
N$10: PROGRAM-COUNTER1:IC9.2 PROGRAM-COUNTER1:V3.12 RAM1:IC17.5
N$11: PROGRAM-COUNTER1:IC9.1 PROGRAM-COUNTER1:V3.13 RAM1:IC17.11
N$12: PROGRAM-COUNTER1:IC9.7 PROGRAM-COUNTER1:V3.14 RAM1:IC17.14
N$13: PROGRAM-COUNTER1:IC10.6 PROGRAM-COUNTER1:V4.11 RAM1:IC18.2
N$14: PROGRAM-COUNTER1:IC10.2 PROGRAM-COUNTER1:V4.12 RAM1:IC18.5
N$15: PROGRAM-COUNTER1:IC10.1 PROGRAM-COUNTER1:V4.13 RAM1:IC18.11
N$16: PROGRAM-COUNTER1:IC10.7 PROGRAM-COUNTER1:V4.14 RAM1:IC18.14
N$17: A_REGISTER1:IC1.2 A_REGISTER1:IC3.3 A_REGISTER1:IC7.6 ALU1:IC4.5
N$18: A_REGISTER1:IC1.3 A_REGISTER1:IC3.4 A_REGISTER1:IC7.2 ALU1:IC4.3
N$19: A_REGISTER1:IC1.4 A_REGISTER1:IC3.5 A_REGISTER1:IC7.1 ALU1:IC4.14
N$20: A_REGISTER1:IC1.5 A_REGISTER1:IC1.6 A_REGISTER1:IC2.3 A_REGISTER1:IC3.6 A_REGISTER1:IC7.7 A_REGISTER1:IC8.6 ALU1:IC3.5 ALU1:IC4.12
N$21: A_REGISTER1:IC1.7 A_REGISTER1:IC2.4 A_REGISTER1:IC8.2 ALU1:IC3.3
N$22: A_REGISTER1:IC1.8 A_REGISTER1:IC2.5 A_REGISTER1:IC8.1 ALU1:IC3.14
N$23: A_REGISTER1:IC1.9 A_REGISTER1:IC2.6 A_REGISTER1:IC8.7 ALU1:IC3.12
N$24: ALU1:IC2.12 B_REGISTER1:IC3.3 B_REGISTER1:IC7.6
N$25: ALU1:IC2.9 B_REGISTER1:IC3.4 B_REGISTER1:IC7.2
N$26: ALU1:IC2.4 B_REGISTER1:IC3.5 B_REGISTER1:IC7.1
N$27: ALU1:IC2.1 B_REGISTER1:IC3.6 B_REGISTER1:IC7.7
N$28: ALU1:IC1.12 B_REGISTER1:IC2.3 B_REGISTER1:IC8.6
N$29: ALU1:IC1.9 B_REGISTER1:IC2.4 B_REGISTER1:IC8.2
N$30: ALU1:IC1.4 B_REGISTER1:IC2.5 B_REGISTER1:IC8.1
N$31: ALU1:IC1.1 B_REGISTER1:IC2.6 B_REGISTER1:IC8.7
N$32: CONTROL_LOGIC1:IC1.6 CONTROL_LOGIC1:IC2.6 INST_REGISTER1:IC3.5 INST_REGISTER1:LED11.A
N$33: CONTROL_LOGIC1:IC1.5 CONTROL_LOGIC1:IC2.5 INST_REGISTER1:IC3.6 INST_REGISTER1:LED12.A
N$34: CONTROL_LOGIC1:IC1.4 CONTROL_LOGIC1:IC2.4 INST_REGISTER1:IC2.3 INST_REGISTER1:LED13.A
N$35: CONTROL_LOGIC1:IC1.3 CONTROL_LOGIC1:IC2.3 INST_REGISTER1:IC2.4 INST_REGISTER1:LED14.A
N$36: CONTROL_LOGIC1:IC1.2 CONTROL_LOGIC1:IC2.2 INST_REGISTER1:IC2.5 INST_REGISTER1:LED15.A
N$37: CONTROL_LOGIC1:IC1.1 CONTROL_LOGIC1:IC2.1 INST_REGISTER1:IC2.6 INST_REGISTER1:LED16.A
PC_LE: CONTROL_LOGIC1:IC1.16 CONTROL_LOGIC1:LED2.A PROGRAM-COUNTER1:V1.9 PROGRAM-COUNTER1:V2.9 PROGRAM-COUNTER1:V3.9 PROGRAM-COUNTER1:V4.9
PC_LRS: CONTROL_LOGIC1:IC1.17 CONTROL_LOGIC1:LED1.A PROGRAM-COUNTER1:IC1.9 PROGRAM-COUNTER1:IC1.10 PROGRAM-COUNTER1:IC2.9 PROGRAM-COUNTER1:IC2.10 PROGRAM-COUNTER1:IC3.1
PROGRAM-COUNTER1:+UB: PROGRAM-COUNTER1:V1.16 PROGRAM-COUNTER1:V2.16 PROGRAM-COUNTER1:V3.16 PROGRAM-COUNTER1:V4.16
PROGRAM-COUNTER1:-UB: PROGRAM-COUNTER1:V1.8 PROGRAM-COUNTER1:V2.8 PROGRAM-COUNTER1:V3.8 PROGRAM-COUNTER1:V4.8
PROGRAM-COUNTER1:N$1: PROGRAM-COUNTER1:IC1.6 PROGRAM-COUNTER1:LED13.A PROGRAM-COUNTER1:V1.6
PROGRAM-COUNTER1:N$2: PROGRAM-COUNTER1:IC2.6 PROGRAM-COUNTER1:LED9.A PROGRAM-COUNTER1:V2.6
PROGRAM-COUNTER1:N$3: PROGRAM-COUNTER1:IC2.5 PROGRAM-COUNTER1:LED10.A PROGRAM-COUNTER1:V2.5
PROGRAM-COUNTER1:N$4: PROGRAM-COUNTER1:IC2.4 PROGRAM-COUNTER1:LED11.A PROGRAM-COUNTER1:V2.4
PROGRAM-COUNTER1:N$5: PROGRAM-COUNTER1:IC2.3 PROGRAM-COUNTER1:LED12.A PROGRAM-COUNTER1:V2.3
PROGRAM-COUNTER1:N$6: PROGRAM-COUNTER1:IC1.5 PROGRAM-COUNTER1:LED14.A PROGRAM-COUNTER1:V1.5
PROGRAM-COUNTER1:N$7: PROGRAM-COUNTER1:IC1.4 PROGRAM-COUNTER1:LED15.A PROGRAM-COUNTER1:V1.4
PROGRAM-COUNTER1:N$8: PROGRAM-COUNTER1:IC1.3 PROGRAM-COUNTER1:LED16.A PROGRAM-COUNTER1:V1.3
PROGRAM-COUNTER1:N$9: PROGRAM-COUNTER1:D1.7 PROGRAM-COUNTER1:IC7.13
PROGRAM-COUNTER1:N$10: PROGRAM-COUNTER1:D1.6 PROGRAM-COUNTER1:IC7.12
PROGRAM-COUNTER1:N$11: PROGRAM-COUNTER1:D1.4 PROGRAM-COUNTER1:IC7.11
PROGRAM-COUNTER1:N$12: PROGRAM-COUNTER1:D1.2 PROGRAM-COUNTER1:IC7.10
PROGRAM-COUNTER1:N$13: PROGRAM-COUNTER1:D1.1 PROGRAM-COUNTER1:IC7.9
PROGRAM-COUNTER1:N$14: PROGRAM-COUNTER1:D1.9 PROGRAM-COUNTER1:IC7.15
PROGRAM-COUNTER1:N$15: PROGRAM-COUNTER1:D1.10 PROGRAM-COUNTER1:IC7.14
PROGRAM-COUNTER1:N$16: PROGRAM-COUNTER1:D2.7 PROGRAM-COUNTER1:IC8.13
PROGRAM-COUNTER1:N$17: PROGRAM-COUNTER1:IC4.6 PROGRAM-COUNTER1:LED1.A PROGRAM-COUNTER1:V3.6
PROGRAM-COUNTER1:N$18: PROGRAM-COUNTER1:IC4.5 PROGRAM-COUNTER1:LED2.A PROGRAM-COUNTER1:V3.5
PROGRAM-COUNTER1:N$19: PROGRAM-COUNTER1:IC4.4 PROGRAM-COUNTER1:LED3.A PROGRAM-COUNTER1:V3.4
PROGRAM-COUNTER1:N$20: PROGRAM-COUNTER1:IC4.3 PROGRAM-COUNTER1:LED4.A PROGRAM-COUNTER1:V3.3
PROGRAM-COUNTER1:N$21: PROGRAM-COUNTER1:D2.6 PROGRAM-COUNTER1:IC8.12
PROGRAM-COUNTER1:N$22: PROGRAM-COUNTER1:D2.4 PROGRAM-COUNTER1:IC8.11
PROGRAM-COUNTER1:N$23: PROGRAM-COUNTER1:D2.2 PROGRAM-COUNTER1:IC8.10
PROGRAM-COUNTER1:N$24: PROGRAM-COUNTER1:D2.1 PROGRAM-COUNTER1:IC8.9
PROGRAM-COUNTER1:N$25: PROGRAM-COUNTER1:IC5.6 PROGRAM-COUNTER1:LED5.A PROGRAM-COUNTER1:V4.6
PROGRAM-COUNTER1:N$26: PROGRAM-COUNTER1:IC5.5 PROGRAM-COUNTER1:LED6.A PROGRAM-COUNTER1:V4.5
PROGRAM-COUNTER1:N$27: PROGRAM-COUNTER1:IC5.4 PROGRAM-COUNTER1:LED7.A PROGRAM-COUNTER1:V4.4
PROGRAM-COUNTER1:N$28: PROGRAM-COUNTER1:IC5.3 PROGRAM-COUNTER1:LED8.A PROGRAM-COUNTER1:V4.3
PROGRAM-COUNTER1:N$29: PROGRAM-COUNTER1:D2.9 PROGRAM-COUNTER1:IC8.15
PROGRAM-COUNTER1:N$30: PROGRAM-COUNTER1:D2.10 PROGRAM-COUNTER1:IC8.14
PROGRAM-COUNTER1:N$31: PROGRAM-COUNTER1:D3.7 PROGRAM-COUNTER1:IC9.13
PROGRAM-COUNTER1:N$32: PROGRAM-COUNTER1:D3.6 PROGRAM-COUNTER1:IC9.12
PROGRAM-COUNTER1:N$33: PROGRAM-COUNTER1:D3.4 PROGRAM-COUNTER1:IC9.11
PROGRAM-COUNTER1:N$34: PROGRAM-COUNTER1:D3.2 PROGRAM-COUNTER1:IC9.10
PROGRAM-COUNTER1:N$35: PROGRAM-COUNTER1:D3.1 PROGRAM-COUNTER1:IC9.9
PROGRAM-COUNTER1:N$36: PROGRAM-COUNTER1:D3.9 PROGRAM-COUNTER1:IC9.15
PROGRAM-COUNTER1:N$37: PROGRAM-COUNTER1:D3.10 PROGRAM-COUNTER1:IC9.14
PROGRAM-COUNTER1:N$38: PROGRAM-COUNTER1:D4.7 PROGRAM-COUNTER1:IC10.13
PROGRAM-COUNTER1:N$39: PROGRAM-COUNTER1:D4.6 PROGRAM-COUNTER1:IC10.12
PROGRAM-COUNTER1:N$40: PROGRAM-COUNTER1:D4.4 PROGRAM-COUNTER1:IC10.11
PROGRAM-COUNTER1:N$41: PROGRAM-COUNTER1:D4.2 PROGRAM-COUNTER1:IC10.10
PROGRAM-COUNTER1:N$42: PROGRAM-COUNTER1:D4.1 PROGRAM-COUNTER1:IC10.9
PROGRAM-COUNTER1:N$43: PROGRAM-COUNTER1:D4.9 PROGRAM-COUNTER1:IC10.15
PROGRAM-COUNTER1:N$44: PROGRAM-COUNTER1:D4.10 PROGRAM-COUNTER1:IC10.14
PROGRAM-COUNTER1:VCC: PROGRAM-COUNTER1:IC1.16 PROGRAM-COUNTER1:IC2.16 PROGRAM-COUNTER1:IC3.14 PROGRAM-COUNTER1:IC4.16 PROGRAM-COUNTER1:IC5.16 PROGRAM-COUNTER1:IC7.16 PROGRAM-COUNTER1:IC8.16 PROGRAM-COUNTER1:IC9.16 PROGRAM-COUNTER1:IC10.16
PROGRAM-COUNTER1:|LRS: PROGRAM-COUNTER1:IC3.2 PROGRAM-COUNTER1:IC4.9 PROGRAM-COUNTER1:IC4.10 PROGRAM-COUNTER1:IC5.9 PROGRAM-COUNTER1:IC5.10
RAM1:16B_15: RAM1:IC15.5
RAM1:+UB: RAM1:V1.14
RAM1:-UB: RAM1:V1.7
RAM1:A/M: RAM1:IC4.1 RAM1:IC5.1 RAM1:IC6.1 RAM1:IC7.1 RAM1:S2.2
RAM1:CLK: RAM1:IC2.7 RAM1:IC3.7 RAM1:IC12.7 RAM1:IC13.7
RAM1:CLR: RAM1:IC2.15 RAM1:IC3.15 RAM1:IC12.15 RAM1:IC13.15
RAM1:GND: RAM1:D1.3 RAM1:D1.5 RAM1:D1.8 RAM1:D2.3 RAM1:D2.5 RAM1:D2.8 RAM1:D3.3 RAM1:D3.5 RAM1:D3.8 RAM1:D4.3 RAM1:D4.5 RAM1:D4.8 RAM1:IC1.14 RAM1:IC1.20 RAM1:IC2.1 RAM1:IC2.2 RAM1:IC2.8 RAM1:IC3.1 RAM1:IC3.2 RAM1:IC3.8 RAM1:IC4.8 RAM1:IC4.15 RAM1:IC5.8 RAM1:IC5.15 RAM1:IC6.8 RAM1:IC6.15 RAM1:IC7.8 RAM1:IC7.15 RAM1:IC8.3 RAM1:IC8.4 RAM1:IC8.5 RAM1:IC8.6 RAM1:IC8.8 RAM1:IC9.3 RAM1:IC9.4 RAM1:IC9.5 RAM1:IC9.8 RAM1:IC10.3 RAM1:IC10.4 RAM1:IC10.5 RAM1:IC10.8 RAM1:IC11.3 RAM1:IC11.4 RAM1:IC11.5 RAM1:IC11.8 RAM1:IC12.1 RAM1:IC12.2 RAM1:IC12.8 RAM1:IC13.1 RAM1:IC13.2 RAM1:IC13.8 RAM1:IC14.7 RAM1:IC15.8 RAM1:IC16.8 RAM1:IC16.15 RAM1:IC17.8 RAM1:IC17.15 RAM1:IC18.8 RAM1:IC18.15 RAM1:LED9.K RAM1:LED10.K RAM1:LED11.K RAM1:LED12.K RAM1:LED13.K RAM1:LED14.K RAM1:LED15.K RAM1:LED16.K RAM1:S2.1
RAM1:N$1: RAM1:IC12.9 RAM1:IC12.10 RAM1:IC13.9 RAM1:IC13.10 RAM1:V1.6
RAM1:N$2: RAM1:IC2.9 RAM1:IC2.10 RAM1:IC3.9 RAM1:IC3.10 RAM1:V1.3
RAM1:N$3: RAM1:IC14.2 RAM1:V1.5
RAM1:N$4: RAM1:IC4.2 RAM1:IC15.4
RAM1:N$5: RAM1:IC4.5 RAM1:IC15.7
RAM1:N$6: RAM1:IC4.11 RAM1:IC15.9
RAM1:N$7: RAM1:IC4.14 RAM1:IC15.12
RAM1:N$8: RAM1:IC5.2 RAM1:IC16.4
RAM1:N$9: RAM1:IC5.5 RAM1:IC16.7
RAM1:N$10: RAM1:IC5.11 RAM1:IC16.9
RAM1:N$11: RAM1:IC5.14 RAM1:IC16.12
RAM1:N$12: RAM1:IC6.2 RAM1:IC17.4
RAM1:N$13: RAM1:IC6.5 RAM1:IC17.7
RAM1:N$14: RAM1:IC6.11 RAM1:IC17.9
RAM1:N$15: RAM1:IC6.14 RAM1:IC17.12
RAM1:N$16: RAM1:IC7.2 RAM1:IC18.4
RAM1:N$17: RAM1:IC7.5 RAM1:IC18.7
RAM1:N$18: RAM1:IC7.11 RAM1:IC18.9
RAM1:N$19: RAM1:IC7.14 RAM1:IC18.12
RAM1:N$20: RAM1:IC4.3 RAM1:M_ADDR.1
RAM1:N$21: RAM1:IC4.6 RAM1:M_ADDR.3
RAM1:N$22: RAM1:IC4.10 RAM1:M_ADDR.5
RAM1:N$23: RAM1:IC4.13 RAM1:M_ADDR.7
RAM1:N$24: RAM1:IC5.3 RAM1:M_ADDR.9
RAM1:N$25: RAM1:IC5.6 RAM1:M_ADDR.11
RAM1:N$26: RAM1:IC5.10 RAM1:M_ADDR.13
RAM1:N$27: RAM1:IC5.13 RAM1:M_ADDR.15
RAM1:N$28: RAM1:IC6.3 RAM1:M_ADDR.2
RAM1:N$29: RAM1:IC6.6 RAM1:M_ADDR.4
RAM1:N$30: RAM1:IC6.10 RAM1:M_ADDR.6
RAM1:N$31: RAM1:IC6.13 RAM1:M_ADDR.8
RAM1:N$32: RAM1:IC7.3 RAM1:M_ADDR.10
RAM1:N$33: RAM1:IC7.6 RAM1:M_ADDR.12
RAM1:N$34: RAM1:IC7.10 RAM1:M_ADDR.14
RAM1:N$35: RAM1:IC7.13 RAM1:M_ADDR.16
RAM1:N$36: RAM1:IC1.21 RAM1:IC4.4 RAM1:IC11.7
RAM1:N$37: RAM1:IC1.23 RAM1:IC4.7 RAM1:IC11.1
RAM1:N$38: RAM1:D1.7 RAM1:IC8.13
RAM1:N$39: RAM1:D1.6 RAM1:IC8.12
RAM1:N$40: RAM1:IC1.24 RAM1:IC4.9 RAM1:IC11.2
RAM1:N$41: RAM1:IC1.25 RAM1:IC4.12 RAM1:IC11.6
RAM1:N$42: RAM1:IC1.26 RAM1:IC5.4 RAM1:IC10.7
RAM1:N$43: RAM1:IC1.1 RAM1:IC5.7 RAM1:IC10.1
RAM1:N$44: RAM1:IC1.2 RAM1:IC5.9 RAM1:IC10.2
RAM1:N$45: RAM1:IC1.3 RAM1:IC5.12 RAM1:IC10.6
RAM1:N$46: RAM1:IC1.4 RAM1:IC6.4 RAM1:IC9.7
RAM1:N$47: RAM1:IC1.5 RAM1:IC6.7 RAM1:IC9.1
RAM1:N$48: RAM1:IC1.6 RAM1:IC6.9 RAM1:IC9.2
RAM1:N$49: RAM1:IC1.7 RAM1:IC6.12 RAM1:IC9.6
RAM1:N$50: RAM1:IC1.8 RAM1:IC7.4 RAM1:IC8.7
RAM1:N$51: RAM1:IC1.9 RAM1:IC7.7 RAM1:IC8.1
RAM1:N$52: RAM1:IC1.10 RAM1:IC7.9 RAM1:IC8.2
RAM1:N$53: RAM1:IC2.3
RAM1:N$54: RAM1:D1.4 RAM1:IC8.11
RAM1:N$55: RAM1:D1.2 RAM1:IC8.10
RAM1:N$56: RAM1:D1.1 RAM1:IC8.9
RAM1:N$57: RAM1:D1.9 RAM1:IC8.15
RAM1:N$58: RAM1:D1.10 RAM1:IC8.14
RAM1:N$59: RAM1:D2.7 RAM1:IC9.13
RAM1:N$60: RAM1:D2.6 RAM1:IC9.12
RAM1:N$61: RAM1:D2.4 RAM1:IC9.11
RAM1:N$62: RAM1:D2.2 RAM1:IC9.10
RAM1:N$63: RAM1:D2.1 RAM1:IC9.9
RAM1:N$64: RAM1:D2.9 RAM1:IC9.15
RAM1:N$65: RAM1:D2.10 RAM1:IC9.14
RAM1:N$66: RAM1:D3.7 RAM1:IC10.13
RAM1:N$67: RAM1:D3.6 RAM1:IC10.12
RAM1:N$68: RAM1:D3.4 RAM1:IC10.11
RAM1:N$69: RAM1:D3.2 RAM1:IC10.10
RAM1:N$70: RAM1:D3.1 RAM1:IC10.9
RAM1:N$71: RAM1:D3.9 RAM1:IC10.15
RAM1:N$72: RAM1:D3.10 RAM1:IC10.14
RAM1:N$73: RAM1:D4.7 RAM1:IC11.13
RAM1:N$74: RAM1:D4.6 RAM1:IC11.12
RAM1:N$75: RAM1:D4.4 RAM1:IC11.11
RAM1:N$76: RAM1:D4.2 RAM1:IC11.10
RAM1:N$77: RAM1:D4.1 RAM1:IC11.9
RAM1:N$78: RAM1:D4.9 RAM1:IC11.15
RAM1:N$79: RAM1:D4.10 RAM1:IC11.14
RAM1:N$80: RAM1:IC2.4 RAM1:IC15.6
RAM1:N$81: RAM1:IC2.5 RAM1:IC15.10
RAM1:N$82: RAM1:IC2.6 RAM1:IC15.13
RAM1:N$83: RAM1:IC3.3 RAM1:IC16.3
RAM1:N$84: RAM1:IC3.4 RAM1:IC16.6
RAM1:N$85: RAM1:IC3.5 RAM1:IC16.10
RAM1:N$86: RAM1:IC3.6 RAM1:IC16.13
RAM1:N$87: RAM1:IC12.3
RAM1:N$88: RAM1:IC12.4 RAM1:IC17.6
RAM1:N$89: RAM1:IC12.5 RAM1:IC17.10
RAM1:N$90: RAM1:IC12.6 RAM1:IC17.13
RAM1:N$91: RAM1:IC13.3 RAM1:IC18.3
RAM1:N$92: RAM1:IC13.4 RAM1:IC18.6
RAM1:N$93: RAM1:IC13.5 RAM1:IC18.10
RAM1:N$94: RAM1:IC13.6 RAM1:IC18.13
RAM1:N$111: RAM1:IC15.15
RAM1:NC: RAM1:IC7.12
RAM1:VCC: RAM1:IC1.28 RAM1:IC2.16 RAM1:IC3.16 RAM1:IC4.16 RAM1:IC5.16 RAM1:IC6.16 RAM1:IC7.16 RAM1:IC8.16 RAM1:IC9.16 RAM1:IC10.16 RAM1:IC11.16 RAM1:IC12.16 RAM1:IC13.16 RAM1:IC14.14 RAM1:IC15.16 RAM1:IC16.16 RAM1:IC17.16 RAM1:IC18.16 RAM1:S2.3
RAM_LRS: CONTROL_LOGIC1:IC2.9 CONTROL_LOGIC1:LED21.A RAM1:IC14.1 RAM1:V1.2
SLC_ADDR: CONTROL_LOGIC1:IC2.10 CONTROL_LOGIC1:LED20.A RAM1:IC15.1 RAM1:IC16.1 RAM1:IC17.1 RAM1:IC18.1 RAM1:V1.1 RAM1:V1.4
SUB: ALU1:IC1.2 ALU1:IC1.5 ALU1:IC1.10 ALU1:IC1.13 ALU1:IC2.2 ALU1:IC2.5 ALU1:IC2.10 ALU1:IC2.13 ALU1:IC4.7
VCC: A_REGISTER1:IC1.1 A_REGISTER1:IC1.20 A_REGISTER1:IC2.16 A_REGISTER1:IC3.16 A_REGISTER1:IC7.16 A_REGISTER1:IC8.16 ALU1:IC1.14 ALU1:IC2.14 ALU1:IC3.16 ALU1:IC4.16 ALU1:IC5.16 ALU1:IC6.1 ALU1:IC6.20 ALU1:IC7.16 ALU1:IC8.16 CLK1:IC1.14 CLK1:IC2.15 CLK1:IC2.16 CLK1:IC3.4 CLK1:IC3.8 CLK1:IC4.8 CLK1:IC5.4 CLK1:IC5.8 CLK1:IC6.12 CLK1:IC6.13 CLK1:R1.2 CLK1:R3.2 CLK1:R4.2 CLK1:R5.2 CLK1:R6.2 CONTROL_LOGIC1:IC1.18 CONTROL_LOGIC1:IC1.24 CONTROL_LOGIC1:IC2.18 CONTROL_LOGIC1:IC2.24 CONTROL_LOGIC1:IC3.6 CONTROL_LOGIC1:IC3.16 CONTROL_LOGIC1:IC5.14 CONTROL_LOGIC1:S1.NO CONTROL_LOGIC1:V1.7 CONTROL_LOGIC1:V1.9 CONTROL_LOGIC1:V1.10 X1.1
ZF: ALU1:IC5.3 CONTROL_LOGIC1:IC1.8 CONTROL_LOGIC1:IC2.8
|ALUWRITE: ALU1:IC6.19 CONTROL_LOGIC1:IC1.14 CONTROL_LOGIC1:LED4.A
|AREAD: A_REGISTER1:IC2.9 A_REGISTER1:IC2.10 A_REGISTER1:IC3.9 A_REGISTER1:IC3.10 INST_REGISTER1:IC1.3
|AWRITE: A_REGISTER1:IC1.19 CONTROL_LOGIC1:IC1.11 CONTROL_LOGIC1:LED14.A
|BREAD: B_REGISTER1:IC2.9 B_REGISTER1:IC2.10 B_REGISTER1:IC3.9 B_REGISTER1:IC3.10 INST_REGISTER1:IC1.6
|CLR: CONTROL_LOGIC1:IC5.1 CONTROL_LOGIC1:IC5.6 CONTROL_LOGIC1:IC5.9 CONTROL_LOGIC1:IC5.10 PROGRAM-COUNTER1:V1.1 PROGRAM-COUNTER1:V2.1 PROGRAM-COUNTER1:V3.1 PROGRAM-COUNTER1:V4.1
|FL: ALU1:IC5.9 ALU1:IC5.10 CONTROL_LOGIC1:IC1.13 CONTROL_LOGIC1:LED5.A
|INSTREAD: CONTROL_LOGIC1:IC2.13 CONTROL_LOGIC1:LED18.A INST_REGISTER1:IC2.9 INST_REGISTER1:IC2.10 INST_REGISTER1:IC3.9 INST_REGISTER1:IC3.10
|RAM_OUT: CONTROL_LOGIC1:IC2.11 CONTROL_LOGIC1:LED19.A RAM1:IC1.22
|RAM_WRITE: RAM1:IC1.27
|REG_READ: CONTROL_LOGIC1:IC1.10 CONTROL_LOGIC1:LED15.A INST_REGISTER1:IC1.2 INST_REGISTER1:IC1.5

## Tracks (layer width: path | path; a pad name or v marks a point on that pad's centre or on a via)
8B_1  (12 unrouted)
  Bottom 0.508: LED1.A 229.87,135.89
8B_2  (12 unrouted)
  Bottom 0.508: LED2.A 237.49,135.89
8B_3  (12 unrouted)
  Bottom 0.508: LED3.A 245.11,137.16
8B_4  (12 unrouted)
  Bottom 0.508: LED4.A 252.73,137.16
8B_5  (10 unrouted)
  Bottom 0.508: LED5.A 260.35,137.16
8B_6  (10 unrouted)
  Bottom 0.508: LED6.A 267.97,137.16
8B_7  (10 unrouted)
  Bottom 0.508: LED7.A 275.59,137.16
8B_8  (10 unrouted)
  Bottom 0.508: LED8.A 283.21,137.16
A_REGISTER1:N$9  (1 unrouted)
A_REGISTER1:N$10  (1 unrouted)
A_REGISTER1:N$11  (1 unrouted)
A_REGISTER1:N$12  (1 unrouted)
A_REGISTER1:N$13  (1 unrouted)
A_REGISTER1:N$14  (1 unrouted)
A_REGISTER1:N$15  (1 unrouted)
A_REGISTER1:N$16  (1 unrouted)
A_REGISTER1:N$21  (1 unrouted)
A_REGISTER1:N$22  (1 unrouted)
A_REGISTER1:N$23  (1 unrouted)
A_REGISTER1:N$24  (1 unrouted)
A_REGISTER1:N$29  (1 unrouted)
A_REGISTER1:N$30  (1 unrouted)
ALU1:+UB  (1 unrouted)
ALU1:-UB  (1 unrouted)
ALU1:A_9  (3 unrouted)
ALU1:A_10  (3 unrouted)
ALU1:A_11  (3 unrouted)
ALU1:A_12  (3 unrouted)
ALU1:A_13  (3 unrouted)
ALU1:A_14  (3 unrouted)
ALU1:A_15  (3 unrouted)
ALU1:A_16  (3 unrouted)
ALU1:N$1  (1 unrouted)
ALU1:N$2  (1 unrouted)
ALU1:N$3  (1 unrouted)
ALU1:N$4  (1 unrouted)
ALU1:N$5  (1 unrouted)
ALU1:N$6  (1 unrouted)
ALU1:N$7  (1 unrouted)
ALU1:N$8  (1 unrouted)
ALU1:N$9  (1 unrouted)
ALU1:N$10  (1 unrouted)
ALU1:N$11  (1 unrouted)
ALU1:N$12  (1 unrouted)
ALU1:N$13  (1 unrouted)
ALU1:N$14  (1 unrouted)
ALU1:N$15  (1 unrouted)
ALU1:N$16  (1 unrouted)
ALU1:N$17  (1 unrouted)
ALU1:N$18  (1 unrouted)
ALU1:N$19  (1 unrouted)
ALU1:N$20  (1 unrouted)
ALU1:N$21  (1 unrouted)
ALU1:N$22  (1 unrouted)
ALU1:N$23  (1 unrouted)
ALU1:N$24  (1 unrouted)
ALU1:N$25  (1 unrouted)
ALU1:N$29  (1 unrouted)
ALU1:N$30  (1 unrouted)
ALUSUB  (1 unrouted)
B_REGISTER1:N$9  (1 unrouted)
B_REGISTER1:N$10  (1 unrouted)
B_REGISTER1:N$11  (1 unrouted)
B_REGISTER1:N$12  (1 unrouted)
B_REGISTER1:N$13  (1 unrouted)
B_REGISTER1:N$14  (1 unrouted)
B_REGISTER1:N$15  (1 unrouted)
B_REGISTER1:N$16  (1 unrouted)
B_REGISTER1:N$21  (1 unrouted)
B_REGISTER1:N$22  (1 unrouted)
B_REGISTER1:N$23  (1 unrouted)
B_REGISTER1:N$24  (1 unrouted)
B_REGISTER1:N$29  (1 unrouted)
B_REGISTER1:N$30  (1 unrouted)
B_REGISTER1:VCC  (3 unrouted)
CF  (2 unrouted)
CLK  (17 unrouted)
CLK1:ACLK  (1 unrouted)
CLK1:AMS  (1 unrouted)
CLK1:MCLK  (2 unrouted)
CLK1:N$1  (2 unrouted)
CLK1:N$2  (2 unrouted)
CLK1:N$3  (2 unrouted)
CLK1:N$4  (1 unrouted)
CLK1:N$5  (1 unrouted)
CLK1:N$7  (3 unrouted)
CLK1:N$8  (1 unrouted)
CLK1:N$9  (2 unrouted)
CLK1:N$10  (1 unrouted)
CLK1:N$11  (1 unrouted)
CLK1:N$12  (1 unrouted)
CLK1:N$13  (1 unrouted)
CLK1:N$14  (1 unrouted)
CLK1:N$17  (1 unrouted)
CLK1:TRIGGER  (3 unrouted)
CLR  (11 unrouted)
CONTROL_LOGIC1:N$1  (3 unrouted)
CONTROL_LOGIC1:N$2  (3 unrouted)
CONTROL_LOGIC1:N$3  (3 unrouted)
CONTROL_LOGIC1:N$4  (1 unrouted)
CONTROL_LOGIC1:N$5  (1 unrouted)
CONTROL_LOGIC1:N$6  (1 unrouted)
CONTROL_LOGIC1:N$7  (2 unrouted)
CONTROL_LOGIC1:N$8  (1 unrouted)
CONTROL_LOGIC1:N$9  (1 unrouted)
CONTROL_LOGIC1:N$10  (1 unrouted)
CONTROL_LOGIC1:N$11  (1 unrouted)
CONTROL_LOGIC1:N$27  (1 unrouted)
CONTROL_LOGIC1:NNOW  (1 unrouted)
CONTROL_LOGIC1:NNOW2  (1 unrouted)
COUNT  (9 unrouted)
GND  (206 unrouted)
HLT  (2 unrouted)
INST_REGISTER1:INST_2  (1 unrouted)
INST_REGISTER1:N$4  (1 unrouted)
INST_REGISTER1:SLC_REG  (3 unrouted)
INST_REGISTER1:VCC  (3 unrouted)
N$1  (2 unrouted)
N$2  (1 unrouted)
N$3  (2 unrouted)
N$4  (2 unrouted)
N$5  (2 unrouted)
N$6  (2 unrouted)
N$7  (2 unrouted)
N$8  (2 unrouted)
N$9  (2 unrouted)
N$10  (2 unrouted)
N$11  (2 unrouted)
N$12  (2 unrouted)
N$13  (2 unrouted)
N$14  (2 unrouted)
N$15  (2 unrouted)
N$16  (2 unrouted)
N$17  (3 unrouted)
N$18  (3 unrouted)
N$19  (3 unrouted)
N$20  (7 unrouted)
N$21  (3 unrouted)
N$22  (3 unrouted)
N$23  (3 unrouted)
N$24  (2 unrouted)
N$25  (2 unrouted)
N$26  (2 unrouted)
N$27  (2 unrouted)
N$28  (2 unrouted)
N$29  (2 unrouted)
N$30  (2 unrouted)
N$31  (2 unrouted)
N$32  (3 unrouted)
N$33  (3 unrouted)
N$34  (3 unrouted)
N$35  (3 unrouted)
N$36  (3 unrouted)
N$37  (3 unrouted)
PC_LE  (5 unrouted)
PC_LRS  (6 unrouted)
PROGRAM-COUNTER1:+UB  (3 unrouted)
PROGRAM-COUNTER1:-UB  (3 unrouted)
PROGRAM-COUNTER1:N$1  (2 unrouted)
PROGRAM-COUNTER1:N$2  (2 unrouted)
PROGRAM-COUNTER1:N$3  (2 unrouted)
PROGRAM-COUNTER1:N$4  (2 unrouted)
PROGRAM-COUNTER1:N$5  (2 unrouted)
PROGRAM-COUNTER1:N$6  (2 unrouted)
PROGRAM-COUNTER1:N$7  (2 unrouted)
PROGRAM-COUNTER1:N$8  (2 unrouted)
PROGRAM-COUNTER1:N$9  (1 unrouted)
PROGRAM-COUNTER1:N$10  (1 unrouted)
PROGRAM-COUNTER1:N$11  (1 unrouted)
PROGRAM-COUNTER1:N$12  (1 unrouted)
PROGRAM-COUNTER1:N$13  (1 unrouted)
PROGRAM-COUNTER1:N$14  (1 unrouted)
PROGRAM-COUNTER1:N$15  (1 unrouted)
PROGRAM-COUNTER1:N$16  (1 unrouted)
PROGRAM-COUNTER1:N$17  (2 unrouted)
PROGRAM-COUNTER1:N$18  (2 unrouted)
PROGRAM-COUNTER1:N$19  (2 unrouted)
PROGRAM-COUNTER1:N$20  (2 unrouted)
PROGRAM-COUNTER1:N$21  (1 unrouted)
PROGRAM-COUNTER1:N$22  (1 unrouted)
PROGRAM-COUNTER1:N$23  (1 unrouted)
PROGRAM-COUNTER1:N$24  (1 unrouted)
PROGRAM-COUNTER1:N$25  (2 unrouted)
PROGRAM-COUNTER1:N$26  (2 unrouted)
PROGRAM-COUNTER1:N$27  (2 unrouted)
PROGRAM-COUNTER1:N$28  (2 unrouted)
PROGRAM-COUNTER1:N$29  (1 unrouted)
PROGRAM-COUNTER1:N$30  (1 unrouted)
PROGRAM-COUNTER1:N$31  (1 unrouted)
PROGRAM-COUNTER1:N$32  (1 unrouted)
PROGRAM-COUNTER1:N$33  (1 unrouted)
PROGRAM-COUNTER1:N$34  (1 unrouted)
PROGRAM-COUNTER1:N$35  (1 unrouted)
PROGRAM-COUNTER1:N$36  (1 unrouted)
PROGRAM-COUNTER1:N$37  (1 unrouted)
PROGRAM-COUNTER1:N$38  (1 unrouted)
PROGRAM-COUNTER1:N$39  (1 unrouted)
PROGRAM-COUNTER1:N$40  (1 unrouted)
PROGRAM-COUNTER1:N$41  (1 unrouted)
PROGRAM-COUNTER1:N$42  (1 unrouted)
PROGRAM-COUNTER1:N$43  (1 unrouted)
PROGRAM-COUNTER1:N$44  (1 unrouted)
PROGRAM-COUNTER1:VCC  (8 unrouted)
PROGRAM-COUNTER1:|LRS  (4 unrouted)
RAM1:A/M  (4 unrouted)
RAM1:CLK  (3 unrouted)
RAM1:CLR  (3 unrouted)
RAM1:GND  (67 unrouted)
RAM1:N$1  (4 unrouted)
RAM1:N$2  (4 unrouted)
RAM1:N$3  (1 unrouted)
RAM1:N$4  (1 unrouted)
RAM1:N$5  (1 unrouted)
RAM1:N$6  (1 unrouted)
RAM1:N$7  (1 unrouted)
RAM1:N$8  (1 unrouted)
RAM1:N$9  (1 unrouted)
RAM1:N$10  (1 unrouted)
RAM1:N$11  (1 unrouted)
RAM1:N$12  (1 unrouted)
RAM1:N$13  (1 unrouted)
RAM1:N$14  (1 unrouted)
RAM1:N$15  (1 unrouted)
RAM1:N$16  (1 unrouted)
RAM1:N$17  (1 unrouted)
RAM1:N$18  (1 unrouted)
RAM1:N$19  (1 unrouted)
RAM1:N$20  (1 unrouted)
RAM1:N$21  (1 unrouted)
RAM1:N$22  (1 unrouted)
RAM1:N$23  (1 unrouted)
RAM1:N$24  (1 unrouted)
RAM1:N$25  (1 unrouted)
RAM1:N$26  (1 unrouted)
RAM1:N$27  (1 unrouted)
RAM1:N$28  (1 unrouted)
RAM1:N$29  (1 unrouted)
RAM1:N$30  (1 unrouted)
RAM1:N$31  (1 unrouted)
RAM1:N$32  (1 unrouted)
RAM1:N$33  (1 unrouted)
RAM1:N$34  (1 unrouted)
RAM1:N$35  (1 unrouted)
RAM1:N$36  (2 unrouted)
RAM1:N$37  (2 unrouted)
RAM1:N$38  (1 unrouted)
RAM1:N$39  (1 unrouted)
RAM1:N$40  (2 unrouted)
RAM1:N$41  (2 unrouted)
RAM1:N$42  (2 unrouted)
RAM1:N$43  (2 unrouted)
RAM1:N$44  (2 unrouted)
RAM1:N$45  (2 unrouted)
RAM1:N$46  (2 unrouted)
RAM1:N$47  (2 unrouted)
RAM1:N$48  (2 unrouted)
RAM1:N$49  (2 unrouted)
RAM1:N$50  (2 unrouted)
RAM1:N$51  (2 unrouted)
RAM1:N$52  (2 unrouted)
RAM1:N$54  (1 unrouted)
RAM1:N$55  (1 unrouted)
RAM1:N$56  (1 unrouted)
RAM1:N$57  (1 unrouted)
RAM1:N$58  (1 unrouted)
RAM1:N$59  (1 unrouted)
RAM1:N$60  (1 unrouted)
RAM1:N$61  (1 unrouted)
RAM1:N$62  (1 unrouted)
RAM1:N$63  (1 unrouted)
RAM1:N$64  (1 unrouted)
RAM1:N$65  (1 unrouted)
RAM1:N$66  (1 unrouted)
RAM1:N$67  (1 unrouted)
RAM1:N$68  (1 unrouted)
RAM1:N$69  (1 unrouted)
RAM1:N$70  (1 unrouted)
RAM1:N$71  (1 unrouted)
RAM1:N$72  (1 unrouted)
RAM1:N$73  (1 unrouted)
RAM1:N$74  (1 unrouted)
RAM1:N$75  (1 unrouted)
RAM1:N$76  (1 unrouted)
RAM1:N$77  (1 unrouted)
RAM1:N$78  (1 unrouted)
RAM1:N$79  (1 unrouted)
RAM1:N$80  (1 unrouted)
RAM1:N$81  (1 unrouted)
RAM1:N$82  (1 unrouted)
RAM1:N$83  (1 unrouted)
RAM1:N$84  (1 unrouted)
RAM1:N$85  (1 unrouted)
RAM1:N$86  (1 unrouted)
RAM1:N$88  (1 unrouted)
RAM1:N$89  (1 unrouted)
RAM1:N$90  (1 unrouted)
RAM1:N$91  (1 unrouted)
RAM1:N$92  (1 unrouted)
RAM1:N$93  (1 unrouted)
RAM1:N$94  (1 unrouted)
RAM1:VCC  (18 unrouted)
RAM_LRS  (3 unrouted)
SLC_ADDR  (7 unrouted)
SUB  (8 unrouted)
VCC  (41 unrouted)
ZF  (2 unrouted)
|ALUWRITE  (2 unrouted)
|AREAD  (4 unrouted)
|AWRITE  (2 unrouted)
|BREAD  (4 unrouted)
|CLR  (7 unrouted)
|FL  (3 unrouted)
|INSTREAD  (5 unrouted)
|RAM_OUT  (2 unrouted)
|REG_READ  (3 unrouted)